# Altium PCB PCB1.PcbDoc (part 1 of 4)
Units mm, origin at the board's own origin, x right, y up, seen from the top; angles counter-clockwise.
Board outline 120 x 70 mm, 6 copper layers (SIG TOP, GND1, PWR, SIG, GND2, SIG BOT), stack 1.538 mm thick; 355 components, 304 nets, 1156 pads, 166 vias.
Unrouted connection lines stored in the file: 534.
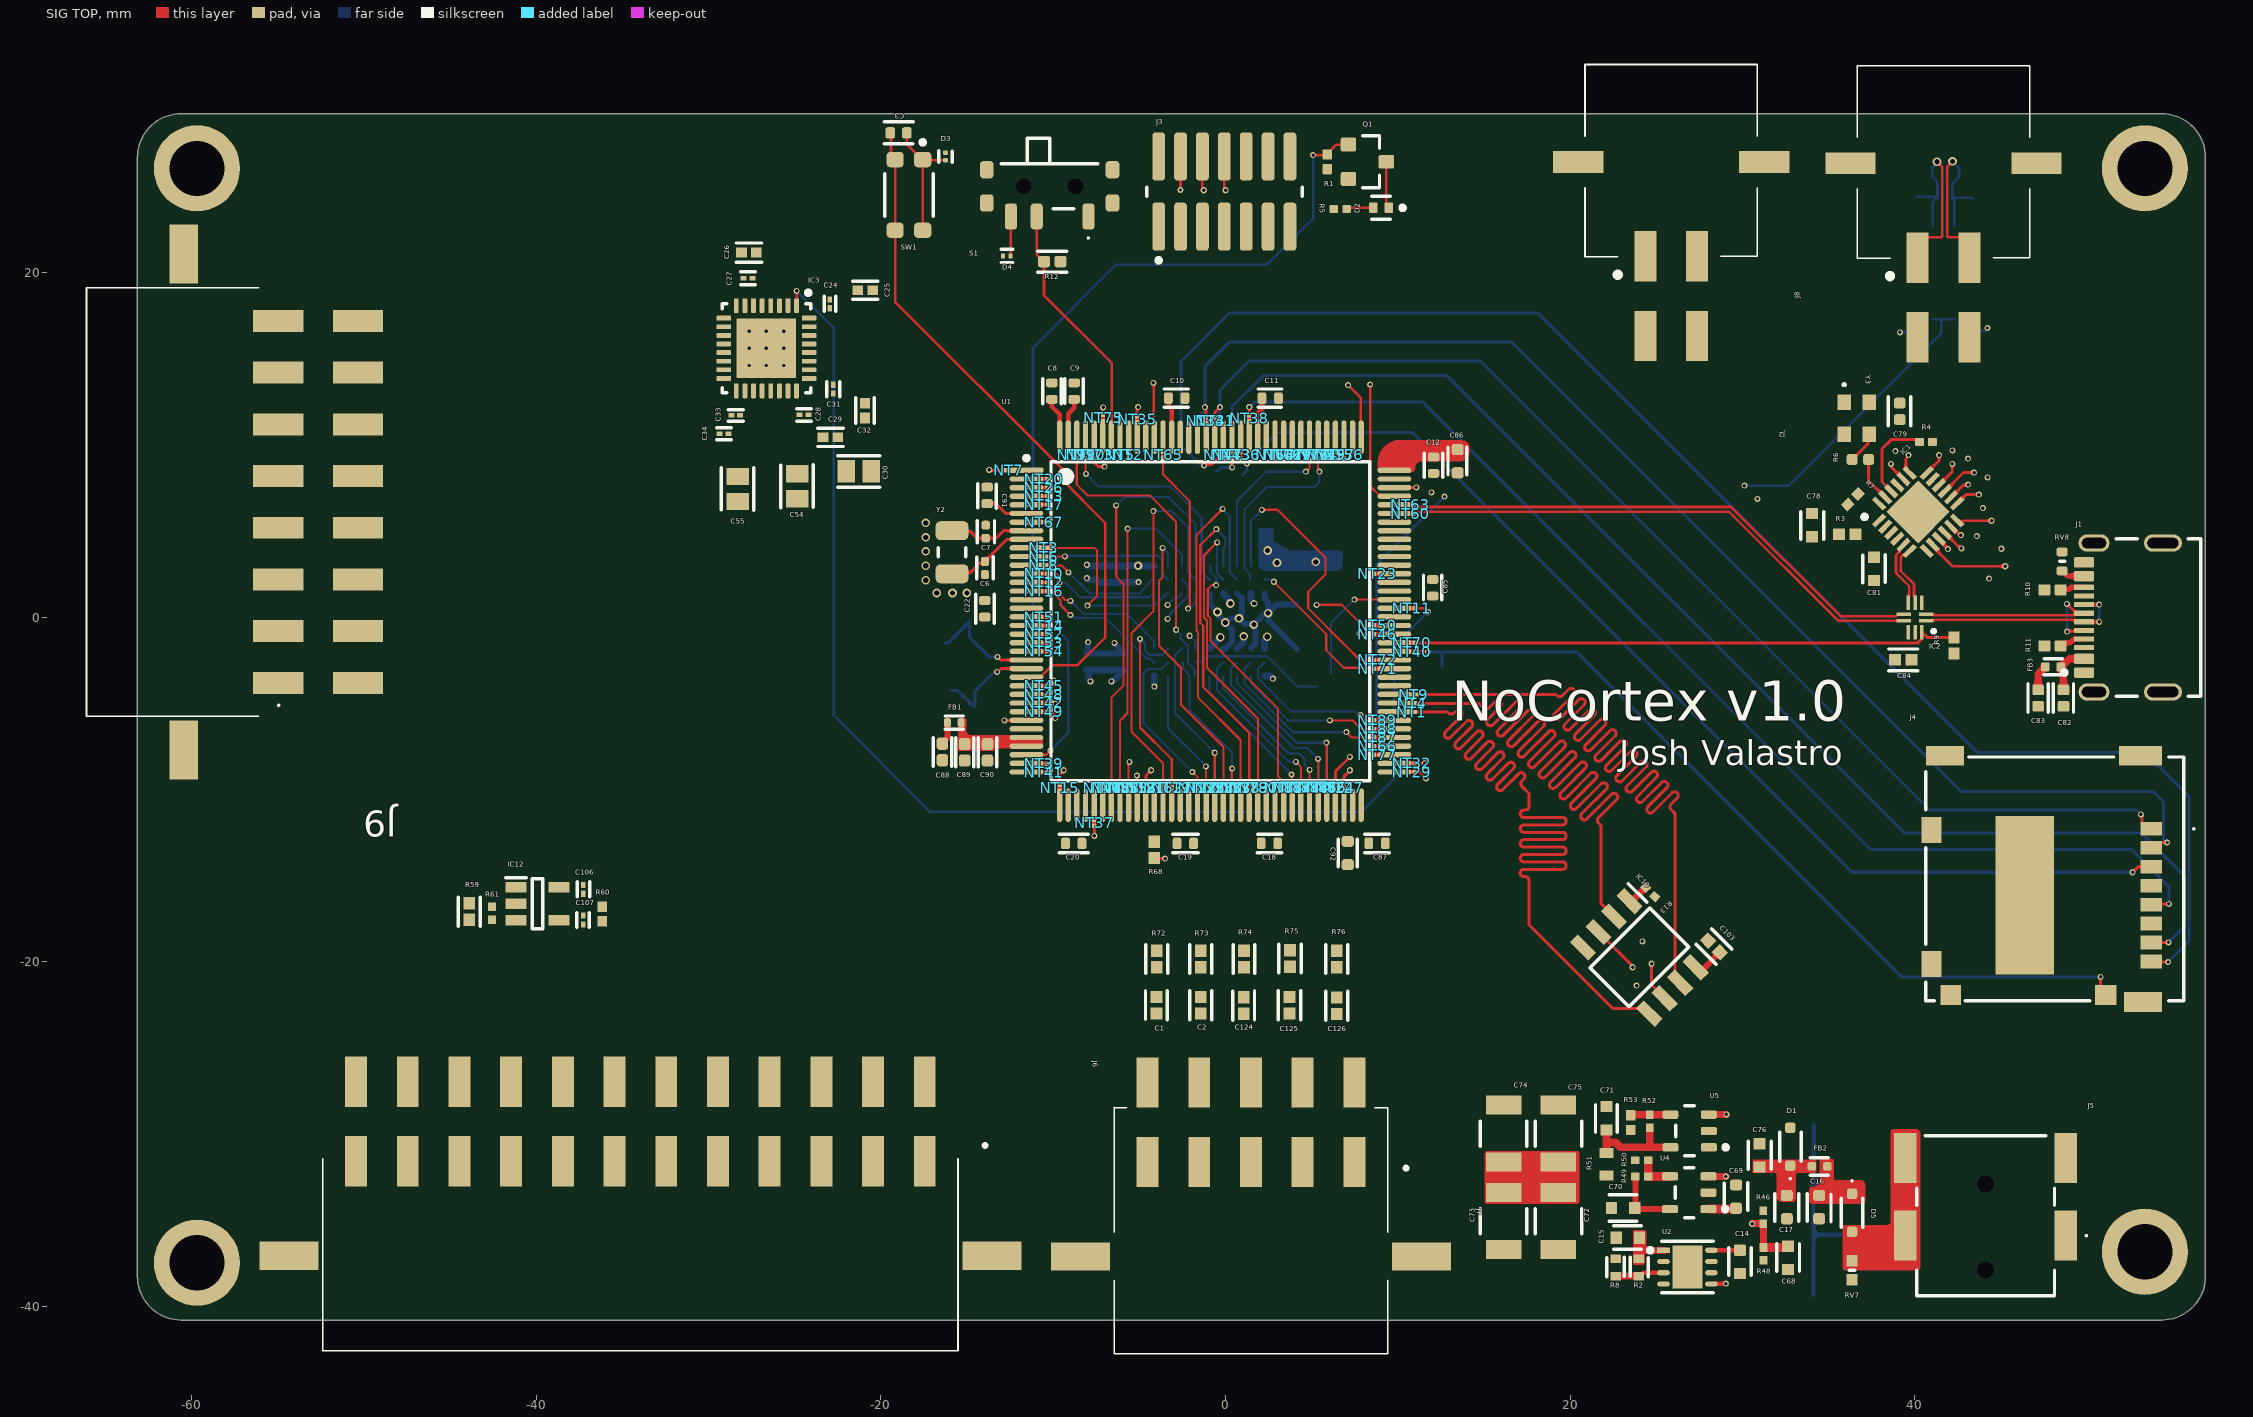
[diagram p0: SIG TOP view]
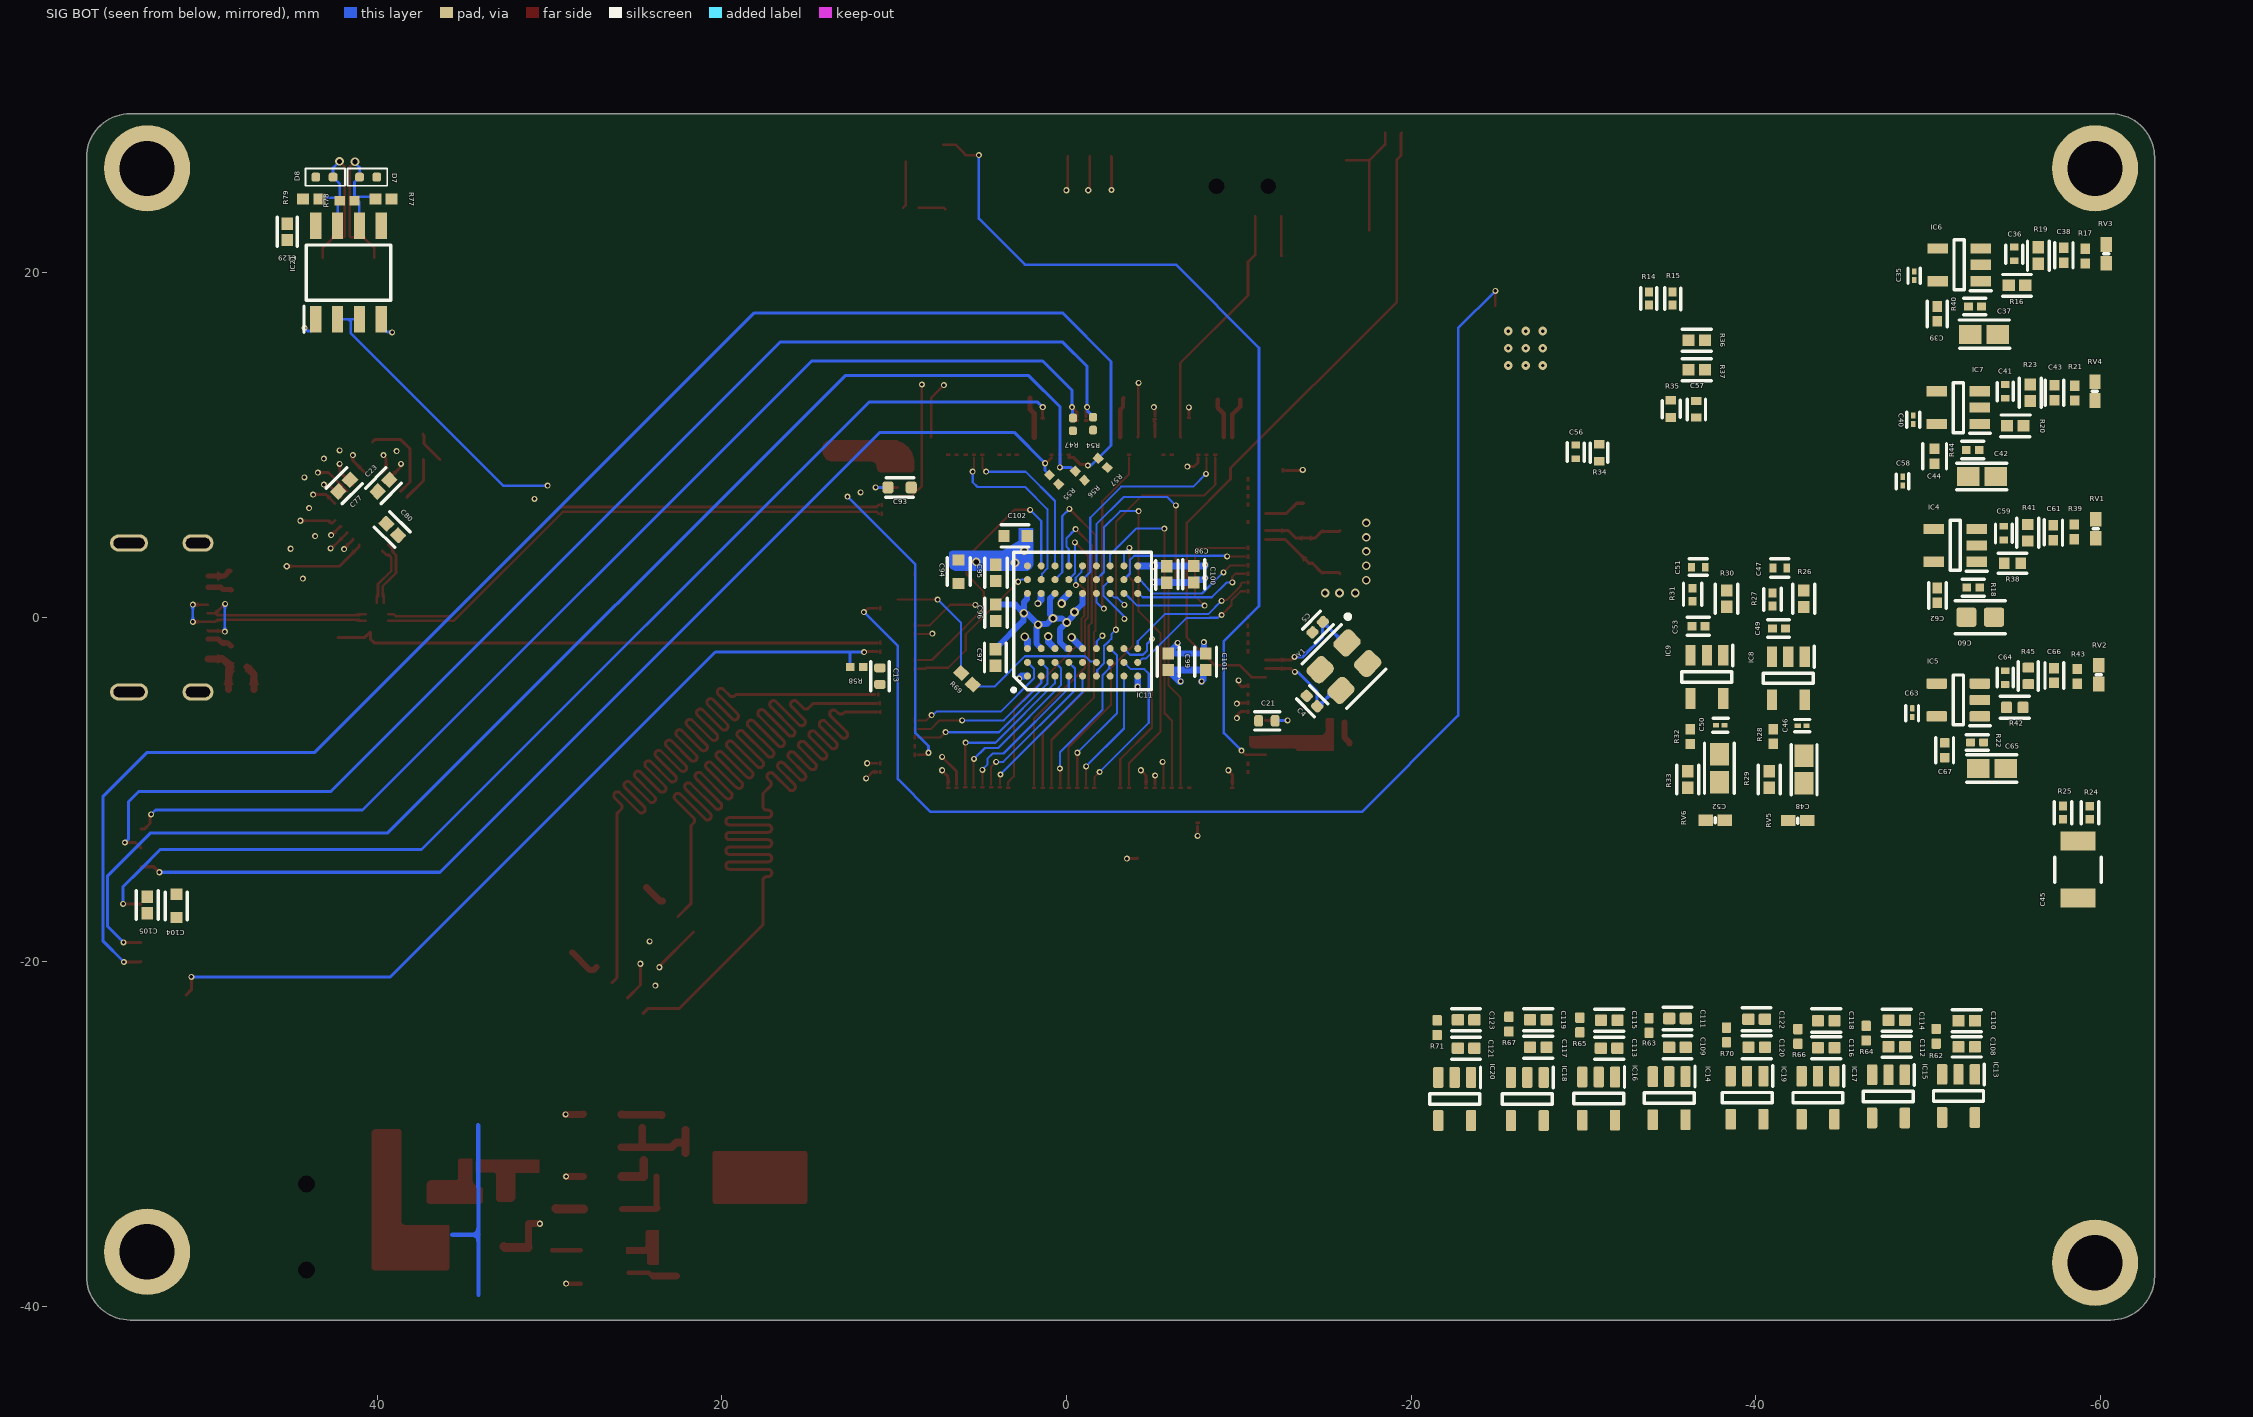
[diagram p1: SIG BOT view, seen from below]
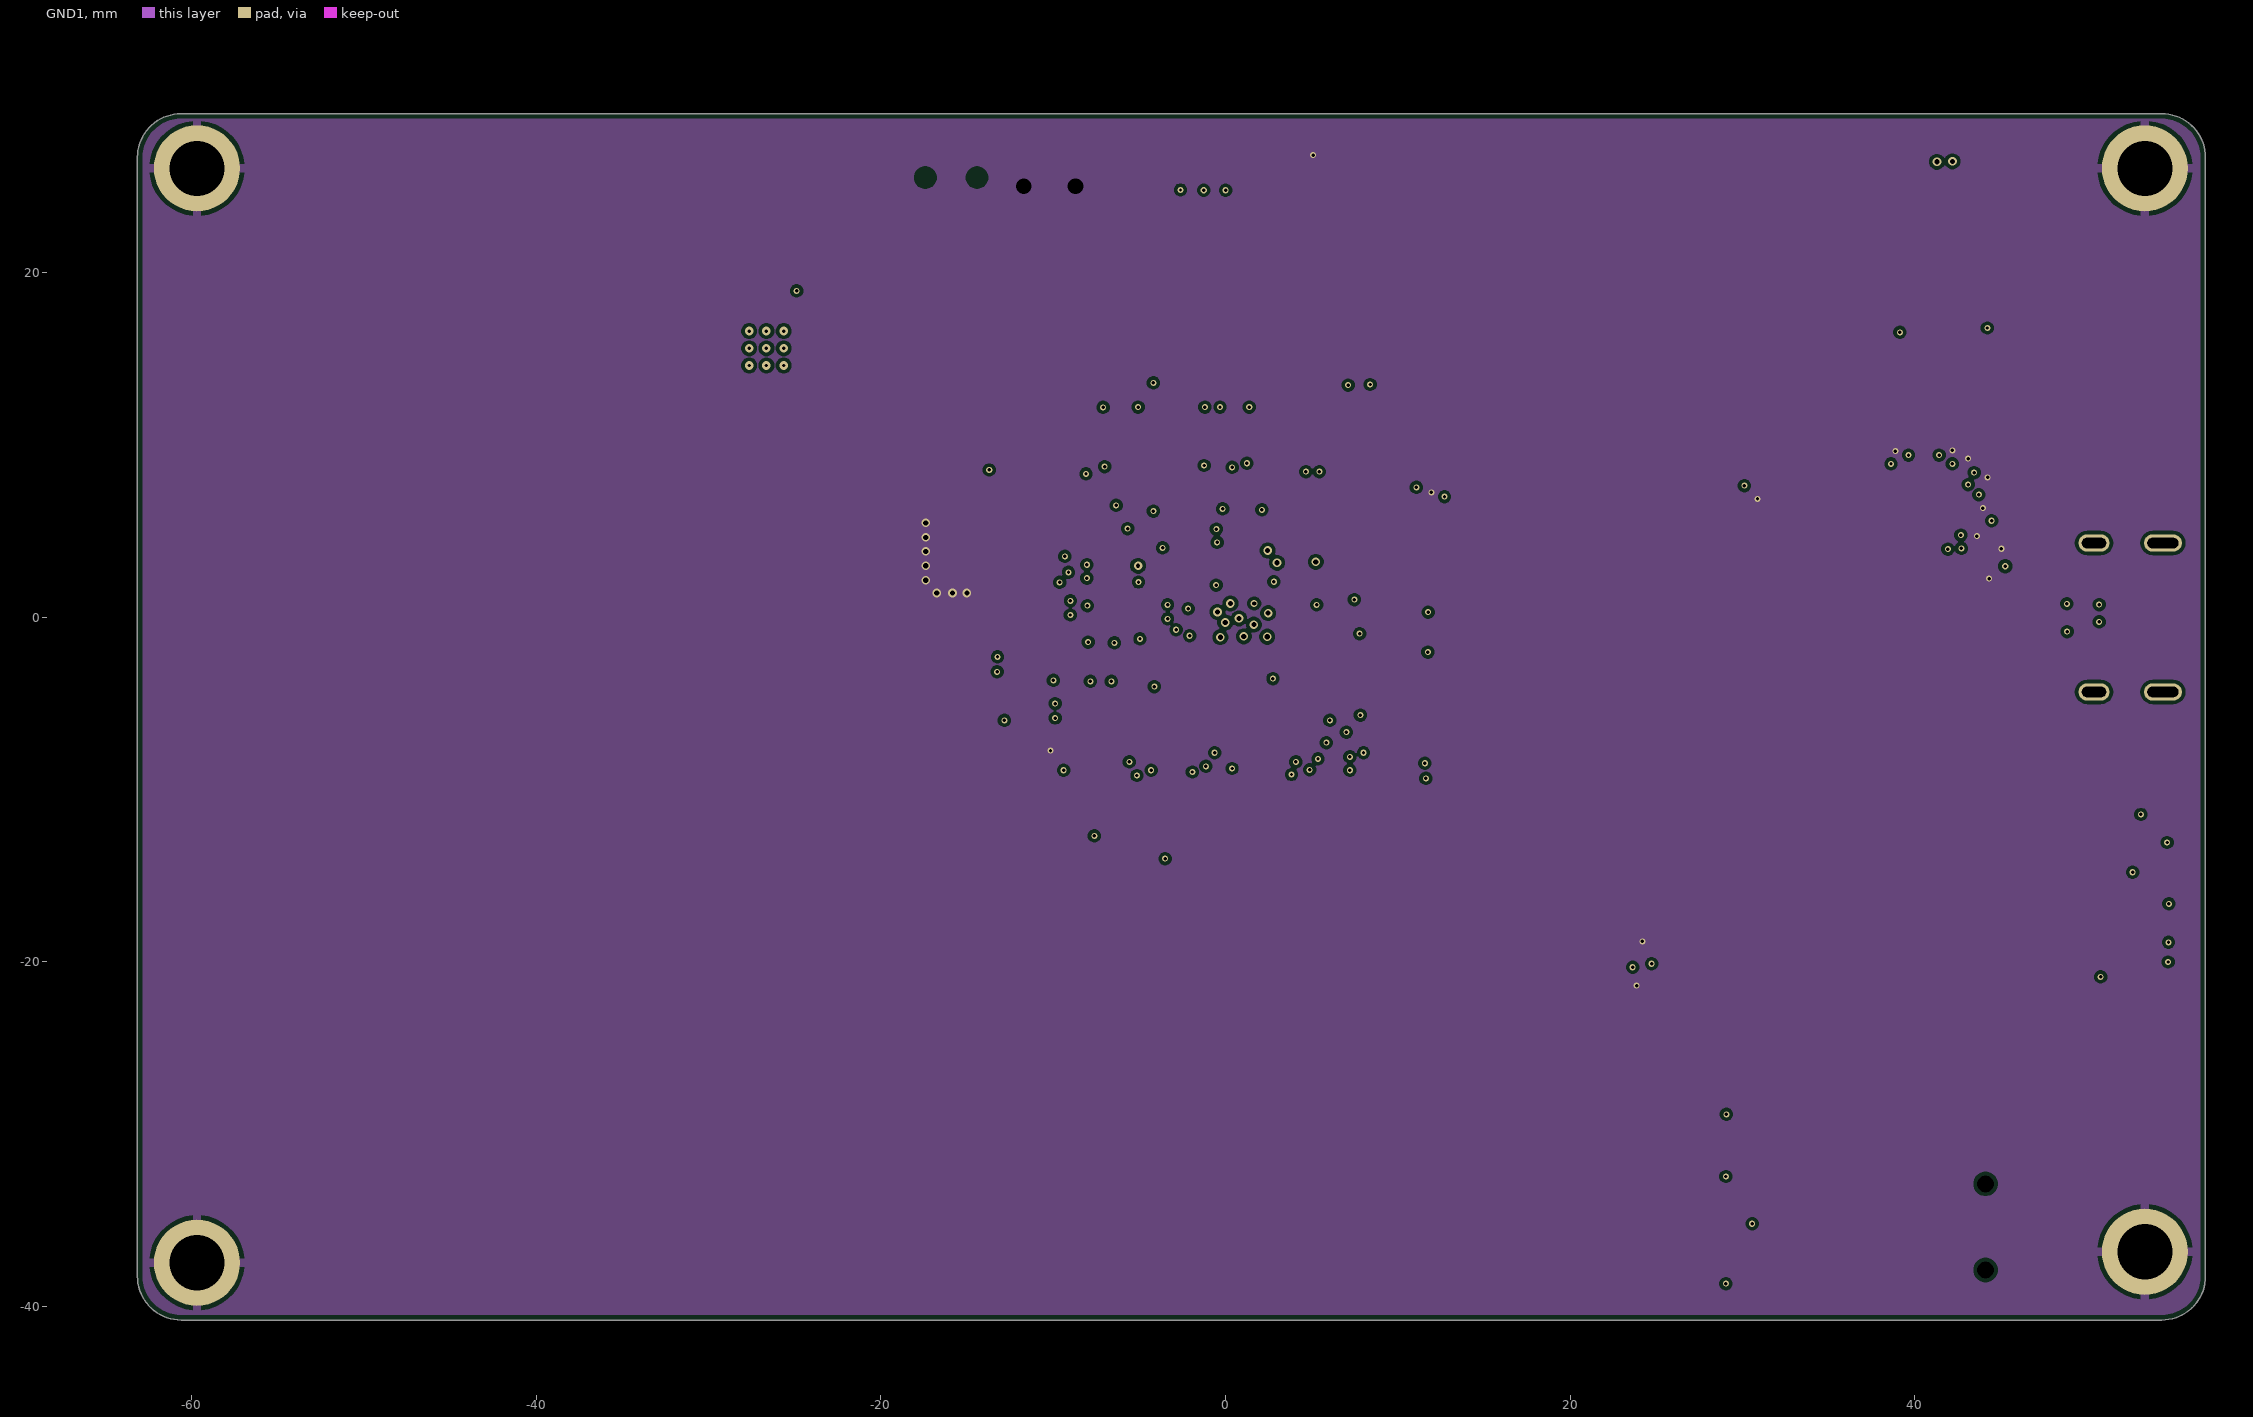
[diagram p2: GND1]
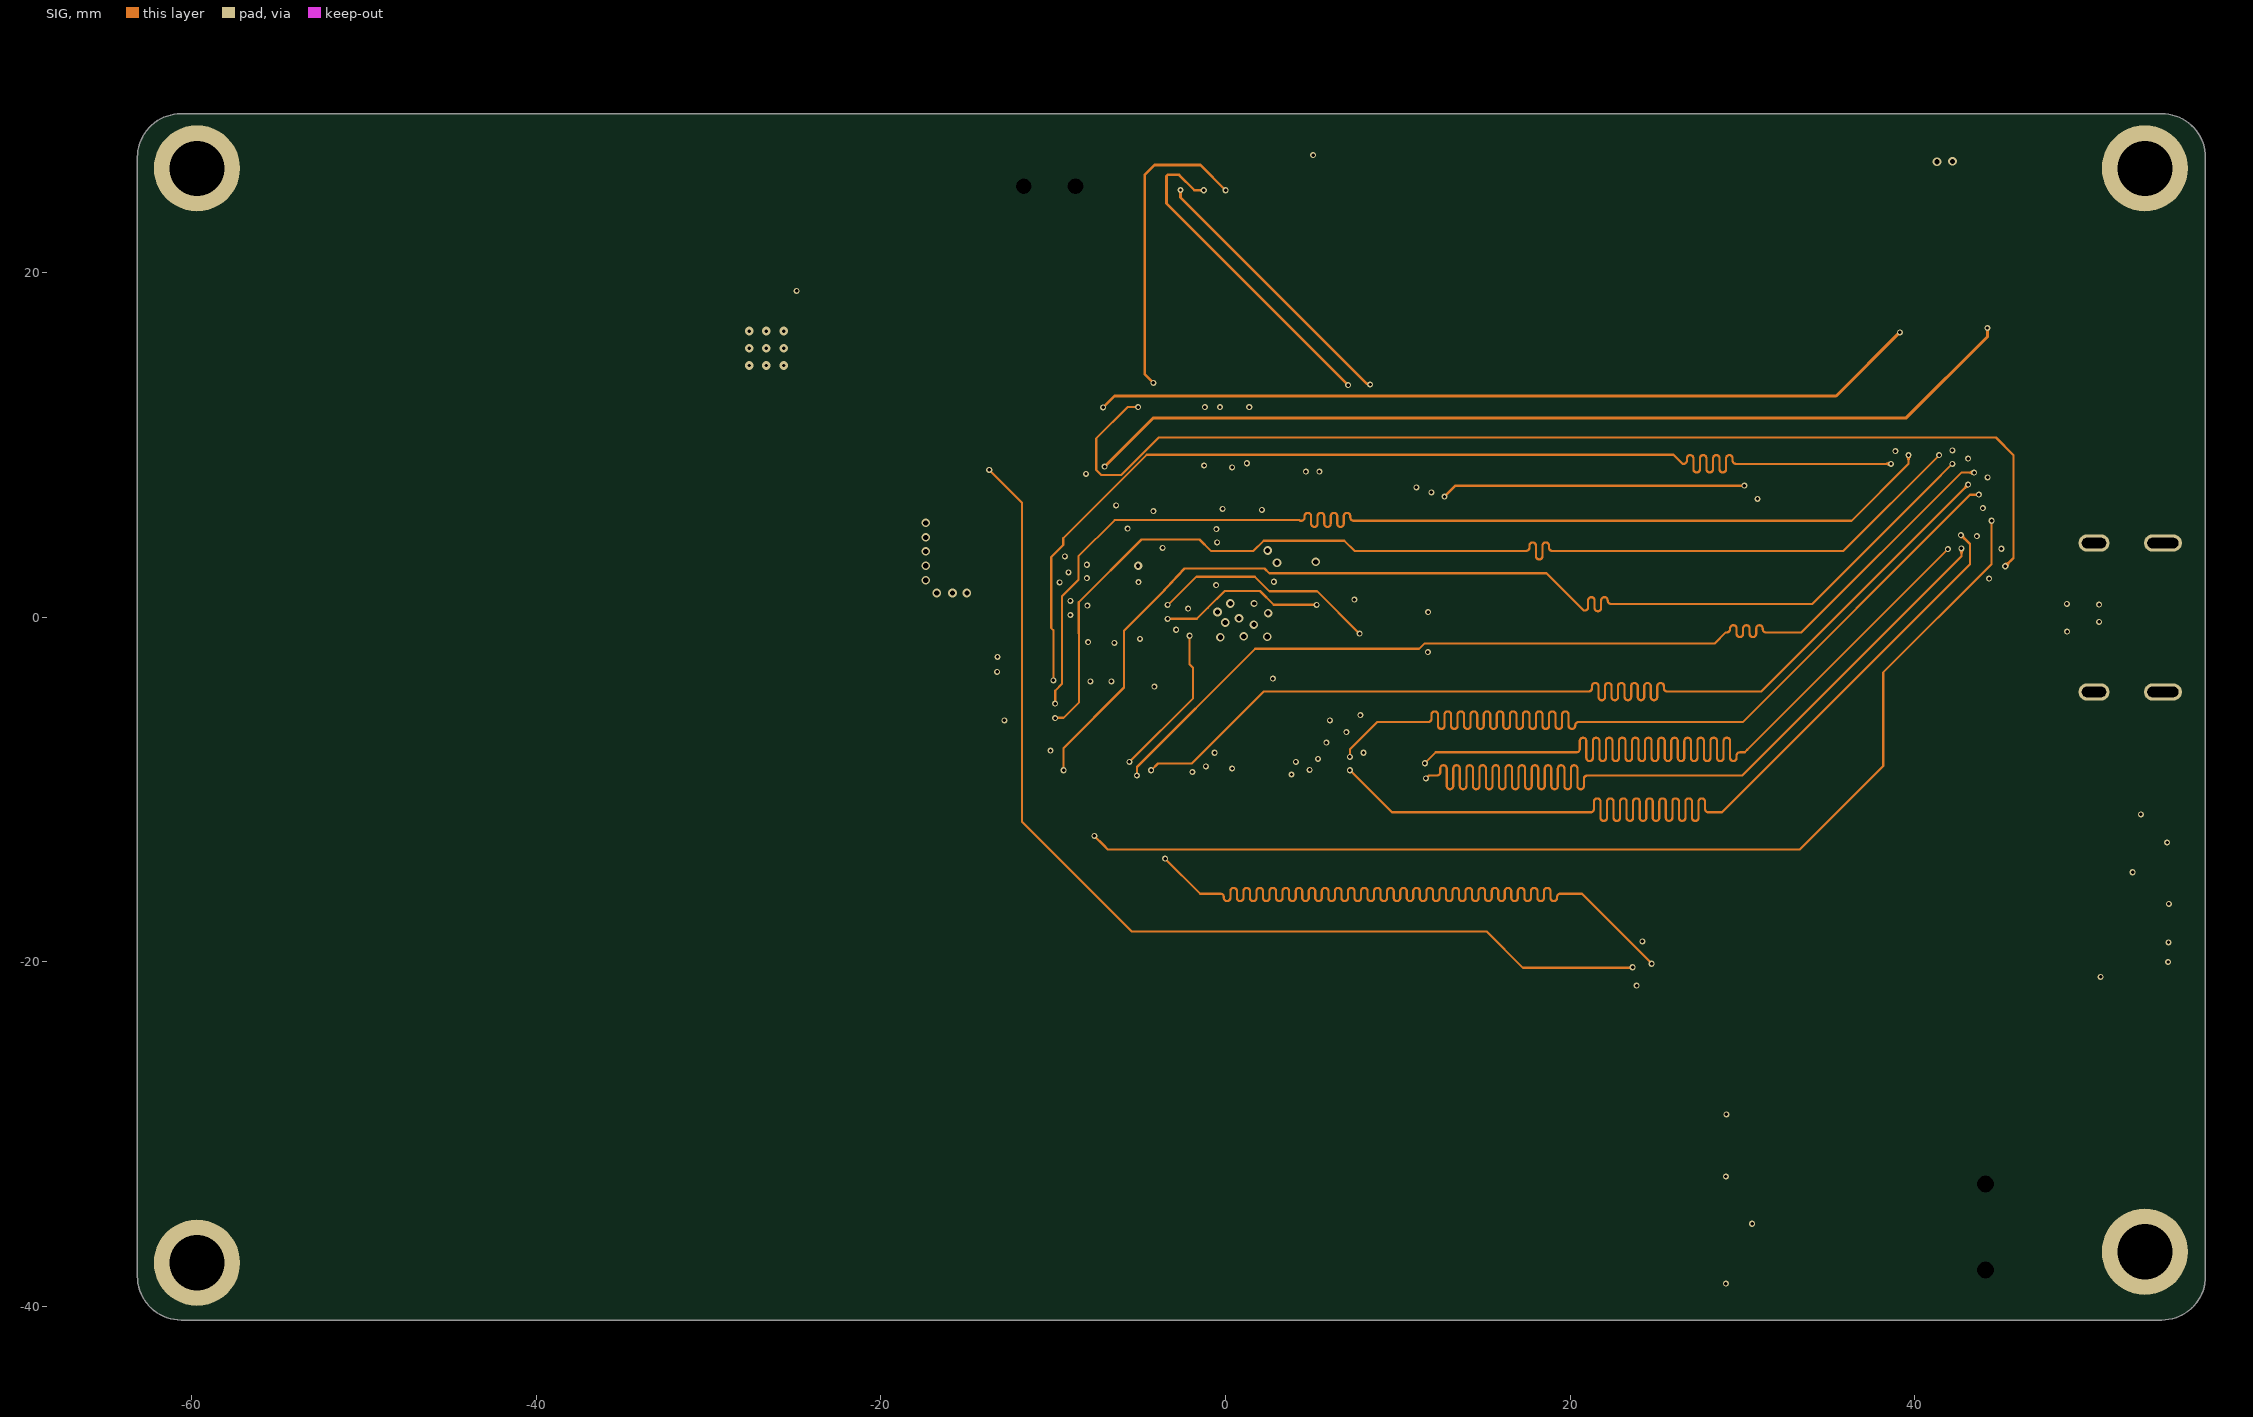
[diagram p3: SIG]
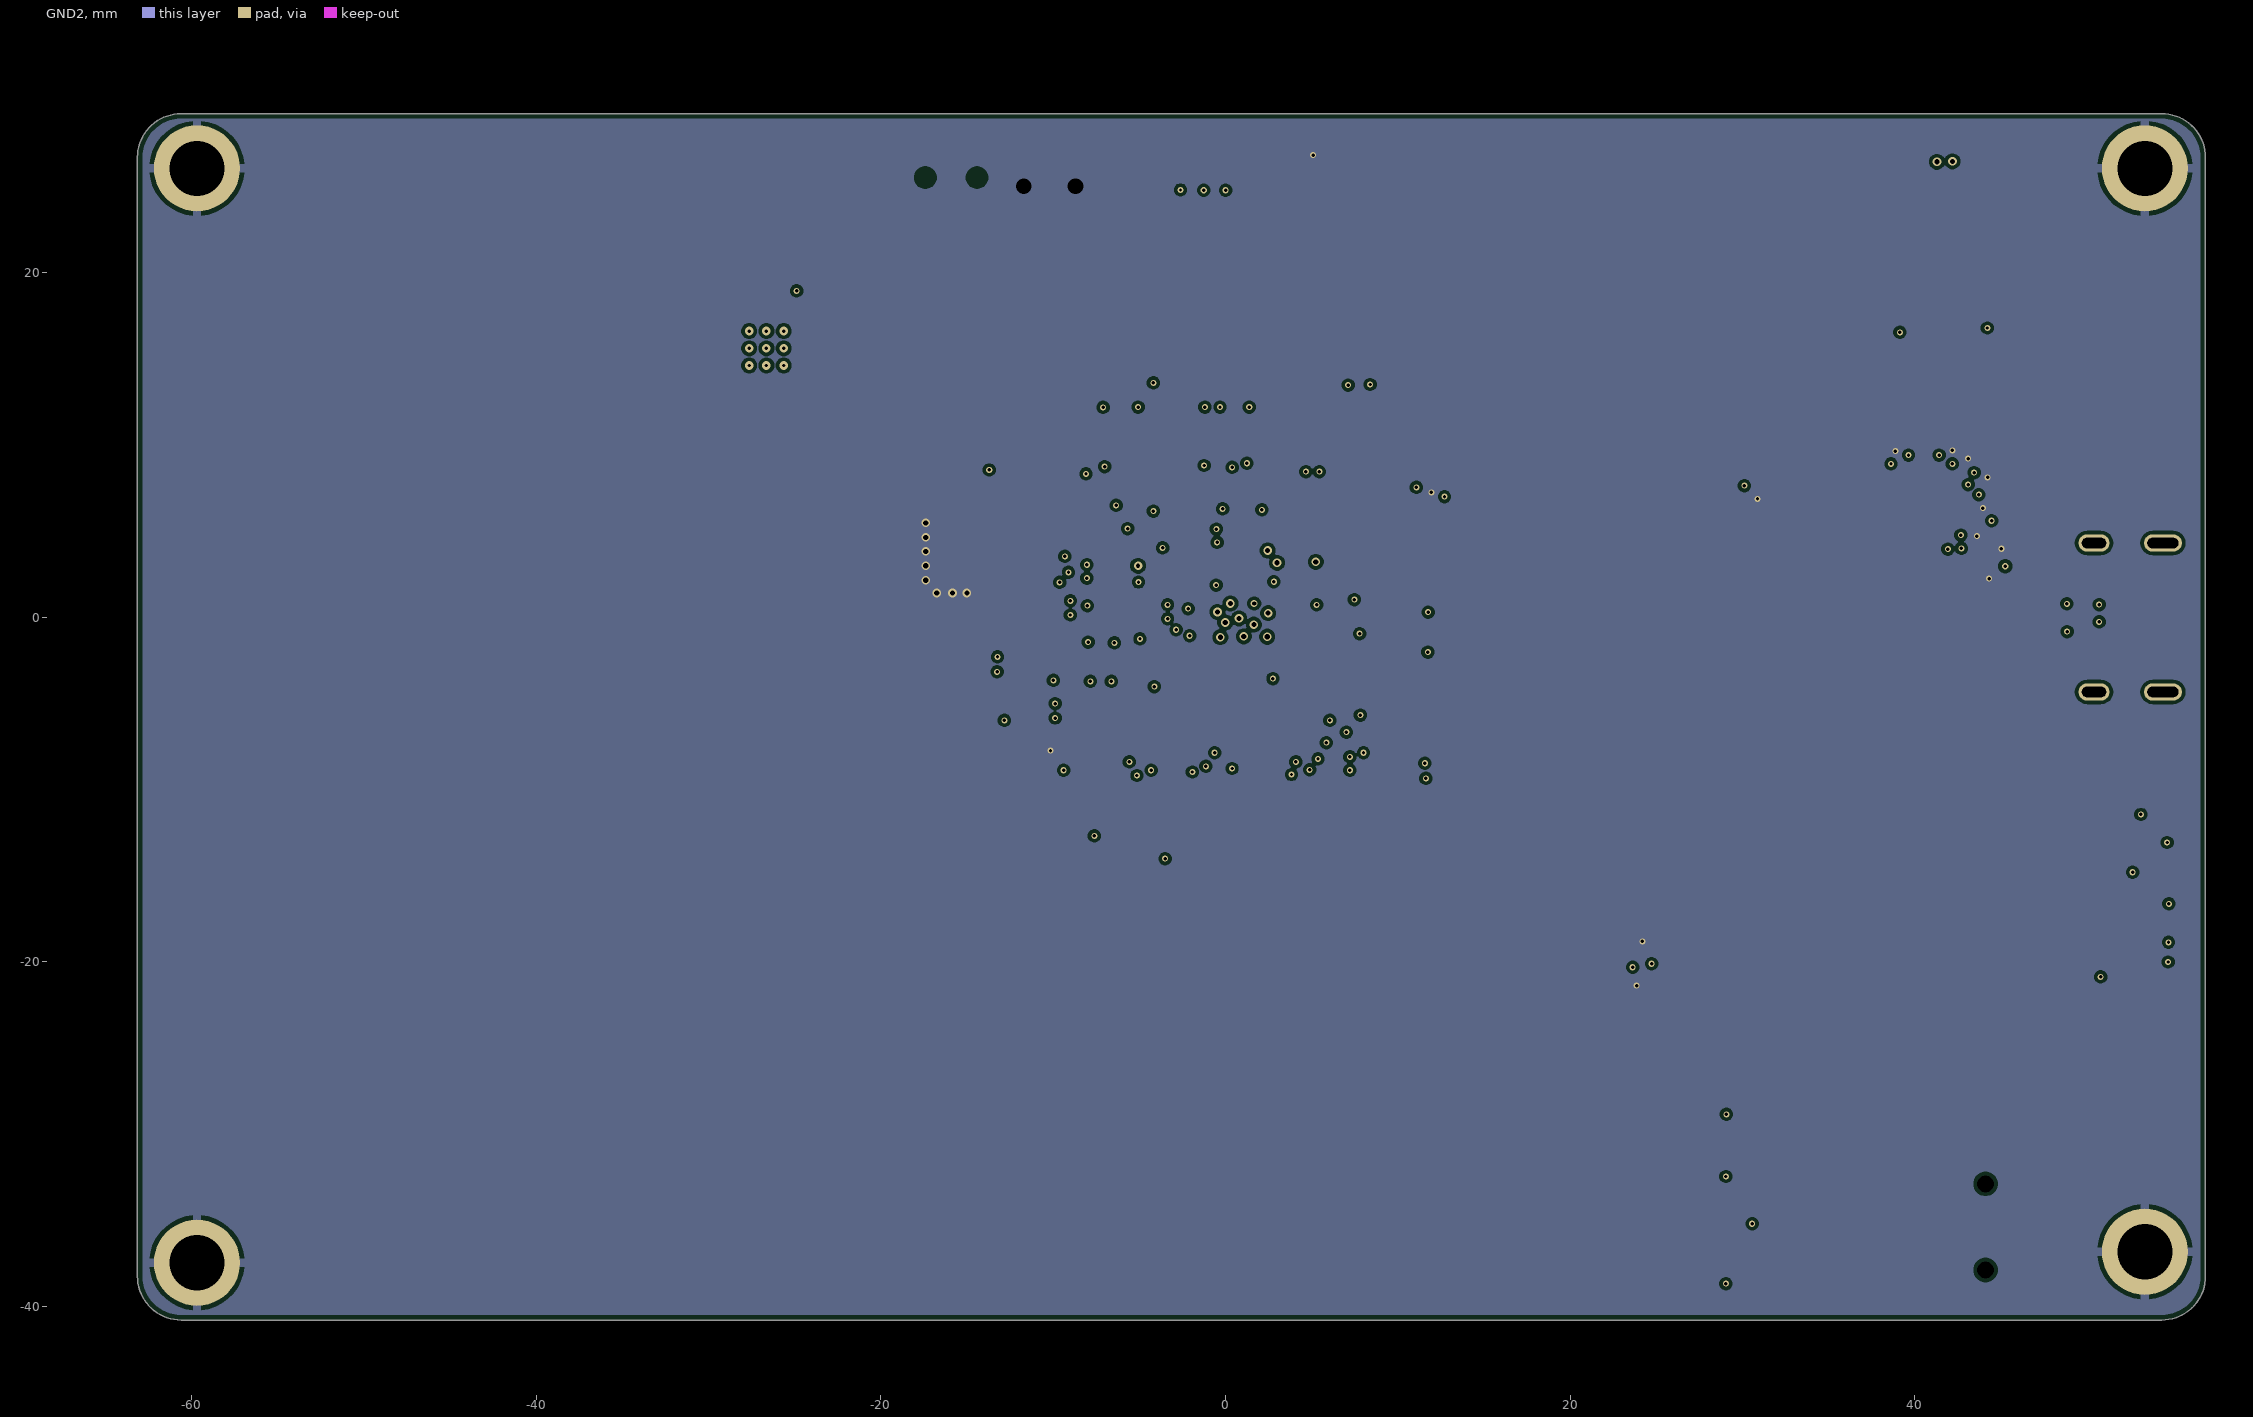
[diagram p4: GND2]

## Layer stack, top to bottom
Top Solder: solder mask 0.0102, Solder Resist, Dk 3.5
SIG TOP: signal copper 0.035
Prepreg 1: prepreg 0.0994, PP-006, Dk 4.1
GND1: signal copper 0.0152
Dielectric 4: core 0.55, Core-009, Dk 4.5
PWR: signal copper 0.0152
Prepreg 2: prepreg 0.1088, FR-4, Dk 4.8
SIG: signal copper 0.0152
Dielectric 5: core 0.55, Core-009, Dk 4.5
GND2: signal copper 0.0152
Dielectric 3: prepreg 0.0994, PP-006, Dk 4.1
SIG BOT: signal copper 0.035
Bottom Solder: solder mask 0.0102, Solder Resist, Dk 3.5

## Board outline
-63.145,-38.252 -63.145,26.668 cw(c-60.605,26.668) -60.605,29.208 54.315,29.208 cw(c54.315,26.668) 56.855,26.668 56.855,-38.252 cw(c54.315,-38.252) 54.315,-40.792 -60.605,-40.792 cw(c-60.605,-38.252)

## Design rules (kind name [scope] priority, off if disabled: settings)
BoardOutlineClearance [All] p1: gap=0.3 ignorepadtopadclearanceinfootprint=FALSE except(0.4: Arc-SplitBarrior Arc-SplitContinuation Track-SplitBarrior Track-SplitContinuation SMDPad-SplitBarrior SMDPad-SplitContinuation THPad-SplitBarrior THPad-SplitContinuation Via-SplitBarrior Via-SplitContinuation Fill-SplitBarrior Fill-SplitContinuation Poly-SplitBarrior Poly-SplitContinuation Region-SplitBarrior Region-SplitContinuation Text-SplitBarrior Text-SplitContinuation)
Clearance "Clearance Different Nets" [All] p1: gap=0.2 ignorepadtopadclearanceinfootprint=FALSE except(0.089: Arc-Arc Arc-Track Arc-SMDPad Track-Track Track-SMDPad; 0.127: SMDPad-SMDPad SMDPad-Via THPad-Via Via-Via; 0.254: Arc-Via Arc-Text Track-Via Track-Text SMDPad-Text THPad-Text Via-Text Fill-Text Poly-Text Region-Text Text-Text; 0.5: THPad-THPad Via-Hole)
Clearance "Clearance Same Nets" [All] p2: gap=0.2 ignorepadtopadclearanceinfootprint=FALSE except(0.089: Arc-Arc Arc-Track Arc-SMDPad Track-Track Track-SMDPad SMDPad-SMDPad; 0.127: SMDPad-Via THPad-Via; 0.254: Arc-Via Arc-Text Track-Via Track-Text SMDPad-Text THPad-Text Via-Via Via-Text Fill-Text Poly-Text Region-Text Text-Text)
Clearance "Clearance Bottom Layer" [OnLayer('Bottom Layer')] p3: gap=0.203 ignorepadtopadclearanceinfootprint=TRUE except(0.254: Arc-Text Track-Text SMDPad-Text THPad-Text Via-Text Fill-Text Poly-Text Region-Text Text-Text)
Clearance "Clearance Top Layer" [OnLayer('Top Layer')] p4: gap=0.203 ignorepadtopadclearanceinfootprint=TRUE except(0.254: Arc-Text Track-Text SMDPad-Text THPad-Text Via-Text Fill-Text Poly-Text Region-Text Text-Text)
ComponentClearance NetTieClearance [InComponentClass('NetTies')] p2: gap=0 collisioncheckmode=3 verticalgap=0 showdistances=FALSE
ComponentClearance NetTies [All] p3: gap=0.254 collisioncheckmode=3 verticalgap=0.254 showdistances=FALSE
DiffPairsRouting [All] p1: maxlimit=0.127 minlimit=0.127 mostfreqgap=0.127 toplayer_minwidth=0.149 toplayer_maxwidth=0.149 toplayer_prefwidth=0.149 midlayer1_minwidth=0.109 midlayer1_maxwidth=0.109 midlayer1_prefwidth=0.109 midlayer2_minwidth=0.102 midlayer2_maxwidth=0.102 midlayer2_prefwidth=0.102 midlayer3_minwidth=0.102 midlayer3_maxwidth=0.102 midlayer3_prefwidth=0.102 midlayer4_minwidth=0.109 midlayer4_maxwidth=0.109 midlayer4_prefwidth=0.109 bottomlayer_minwidth=0.149 bottomlayer_maxwidth=0.149 bottomlayer_prefwidth=0.149 impedanceprofiledriven=TRUE impedanceprofileid={338CEFDF-92EC-4F22-A444-8B00021438B8} impedanceprofilevalue=90.000000 maxuncoupledlength=12.7
HoleSize [All] p1: absolutevalues=TRUE maxlimit=6.3 minlimit=0.2 maxpercent=80.000 minpercent=20.000
HoleToHoleClearance [All] p1: gap=0.154 allowstackedmicrovias=TRUE
MatchedLengths [InDifferentialPairClass('All Differential Pairs')] p1: tolerance=25.4 checknetsindiffpair=FALSE checkdiffpairvsdiffpair=TRUE checkxsignals=TRUE checkothers=TRUE usedelayunits=TRUE delaytolerance=100.000000
MinimumAnnularRing [All] p1: minimumring=0.13
MinimumSolderMaskSliver [All] p1: minsoldermaskwidth=0.1
PolygonConnect PolygonConnect_1 [All] p1: thpad.connectstyle=Relief thpad.reliefconductorwidth=0.508 thpad.reliefentries=4 thpad.polygonreliefangle="90 Angle" thpad.airgapwidth=0.254 smdpad.connectstyle=Relief smdpad.reliefconductorwidth=0.508 smdpad.reliefentries=4 smdpad.polygonreliefangle="90 Angle" smdpad.airgapwidth=0.254 via.connectstyle=Direct via.reliefconductorwidth=0.508 via.reliefentries=4 via.polygonreliefangle="90 Angle" via.airgapwidth=0.254
RoutingCorners [All] p1: cornerstyle=Round minsetback=2.54 maxsetback=2.54
RoutingVias [All] p1: holewidth=0.5 width=1 viastyle="Through Hole" minholewidth=0.2 minwidth=0.35 maxholewidth=1 maxwidth=2
SilkToSilkClearance [All] p1: silktosilkclearance=0.1
SilkToSolderMaskClearance [IsPad] p1: minsilkscreentomaskgap=0.1 clearancetoexposedcopper=TRUE
SolderMaskExpansion [All] p1: expansion=0.102 istentingtop=FALSE
SupplyNets "Schematic Supply Nets_15" [InNet('+5VA')] p1: voltage=0.000
SupplyNets "Schematic Supply Nets_14" [InNet('+5V')] p2: voltage=0.000
SupplyNets "Schematic Supply Nets_12" [InNet('+3V3')] p3: voltage=0.000
SupplyNets "Schematic Supply Nets_11" [InNet('GND')] p4: voltage=0.000
SupplyNets "Schematic Supply Nets_10" [InNet('3V3')] p5: voltage=0.000
SupplyNets "Schematic Supply Nets_9" [InNet('+VUSB_FILT')] p6: voltage=0.000
SupplyNets "Schematic Supply Nets_8" [InNet('+VCC_RP')] p7: voltage=0.000
SupplyNets "Schematic Supply Nets_5" [InNet('+VCC_FILT')] p8: voltage=0.000
SupplyNets "Schematic Supply Nets_4" [InNet('1V8')] p9: voltage=0.000
SupplyNets "Schematic Supply Nets_3" [InNet('+VCC')] p10: voltage=0.000
SupplyNets "Schematic Supply Nets_2" [InNet('+VREF')] p11: voltage=0.000
SupplyNets "Schematic Supply Nets_1" [InNet('+1V8')] p12: voltage=0.000
SupplyNets "Schematic Supply Nets" [InNet('+VUSB')] p13: voltage=0.000
Width "SWO widths" [InNet('DEBUG_JTCK_SWCLK') and InNet('DEBUG_JTDO_SWO') and InNet('DEBUG_JTMS_SWDIO')] p1: maxlimit=0.254 minlimit=0.254 preferedwidth=0.254
Width "CLK Signal Width" [InNet('CODEC_MCLK') and InNet('SAI1_SCK_A')] p2: maxlimit=0.171 minlimit=0.125 preferedwidth=0.129 toplayer_minwidth=0.171 toplayer_prefwidth=0.171 midlayer1_minwidth=0.129 midlayer1_maxwidth=0.129 midlayer2_maxwidth=0.125 midlayer2_prefwidth=0.125 midlayer3_maxwidth=0.125 midlayer3_prefwidth=0.125 midlayer4_minwidth=0.129 midlayer4_maxwidth=0.129 bottomlayer_minwidth=0.171 bottomlayer_prefwidth=0.171 impedanceprofiledriven=TRUE impedanceprofileid={D3C86B80-4249-4FE0-8FF2-653D211A7537} impedanceprofilevalue=50.000000 minimp=50.000000 maximp=50.000000 favimp=50.000000
Width Qspi_width [InNet('QSPI_IO1') or InNet('QSPI_IO2') or InNet('QSPI_IO3') or InNet('QSPI_IO4') or InNet('QSPI_CLK')] p3: maxlimit=0.171 minlimit=0.125 preferedwidth=0.129 toplayer_minwidth=0.171 toplayer_prefwidth=0.171 midlayer1_minwidth=0.129 midlayer1_maxwidth=0.129 midlayer2_maxwidth=0.125 midlayer2_prefwidth=0.125 midlayer3_maxwidth=0.125 midlayer3_prefwidth=0.125 midlayer4_minwidth=0.129 midlayer4_maxwidth=0.129 bottomlayer_minwidth=0.171 bottomlayer_prefwidth=0.171 impedanceprofiledriven=TRUE impedanceprofileid={D3C86B80-4249-4FE0-8FF2-653D211A7537} impedanceprofilevalue=50.000000 minimp=50.000000 maximp=50.000000 favimp=50.000000
Width ULPI_Width [InNetClass('ULPI')] p4: maxlimit=0.171 minlimit=0.125 preferedwidth=0.129 toplayer_minwidth=0.171 toplayer_prefwidth=0.171 midlayer1_minwidth=0.129 midlayer1_maxwidth=0.129 midlayer2_maxwidth=0.125 midlayer2_prefwidth=0.125 midlayer3_maxwidth=0.125 midlayer3_prefwidth=0.125 midlayer4_minwidth=0.129 midlayer4_maxwidth=0.129 bottomlayer_minwidth=0.171 bottomlayer_prefwidth=0.171 impedanceprofiledriven=TRUE impedanceprofileid={D3C86B80-4249-4FE0-8FF2-653D211A7537} impedanceprofilevalue=50.000000 minimp=50.000000 maximp=50.000000 favimp=50.000000
Width [All] p5: maxlimit=2.54 minlimit=0.089 preferedwidth=0.381
23 further rules are at their usual default settings.

## Classes and differential pairs
net class PG[0..15]: PG0 PG1 PG2 PG3 PG4 PG5 PG6 PG7 PG8 PG9 PG10 PG11 PG12 PG13 PG14 PG15
net class PF[0..15]: PF0 PF1 PF2 PF3 PF4 PF5 PF6 PF7 PF8 PF9 PF10 PF11 PF12 PF13 PF14 PF15
net class PE[0..15]: PE0 PE1 PE2 PE3 PE4 PE5 PE6 PE7 PE8 PE9 PE10 PE11 PE12 PE13 PE14 PE15
net class PD[0..15]: PD0 PD1 PD2 PD3 PD4 PD5 PD6 PD7 PD8 PD9 PD10 PD11 PD12 PD13 PD14 PD15
net class PC[0..13]: PC0 PC1 PC2 PC3 PC4 PC5 PC6 PC7 PC8 PC9 PC10 PC11 PC12 PC13
net class PB[0..15]: PB0 PB1 PB2 PB5 PB6 PB7 PB8 PB9 PB10 PB11 PB12 PB13 PB14 PB15
net class PA[1..12]: PA1 PA2 PA3 PA4 PA5 PA6 PA7 PA8 PA11 PA12
component class U_USB_HS: 23 C23 C77 C78 C79 C80 C81 IC1 R3 R4 R6 R7 X1 Y3
component class U_Power: C14 C15 C16 C17 C68 C69 C70 C71 C72 C73 C74 C75 C76 D1 D5 FB2 J5 R2 R8 R46 R48 R49 R50 R51 R52 R53 RV7 U2 U4 U5
component class U_Potentiometers: C108 C109 C110 C111 C112 C113 C114 C115 C116 C117 C118 C119 C120 C121 C122 C123 IC13 IC14 IC15 IC16 IC17 IC18 IC19 IC20 R62 R63 R64 R65 R66 R67 R70 R71
component class U_Peripherals: C82 C83 C84 C129 D7 D8 FB3 IC2 IC21 J1 J2 J6 J8 R9 R10 R11 R77 R78 R79 RV8
component class U_Memory: C94 C95 C96 C97 C98 C99 C100 C101 C102 C103 C104 C105 IC10 IC11 J4 R13 R47 R54 R55 R56 R57 R58
component class U_MCU: C3 C4 C5 C6 C7 C8 C9 C10 C11 C12 C13 C18 C19 C20 C21 C22 C85 C86 C87 C88 C89 C90 C91 C92 C93 D2 D3 D4 FB1 J3 Q1 R1 R5 R12 S1 SW1 U1 Y1 Y2
component class U_MCU_Connections: NT1 NT2 NT3 NT4 NT5 NT6 NT7 NT8 NT9 NT10 NT11 NT12 NT13 NT14 NT15 NT16 NT17 NT18 NT19 NT20 NT21 NT22 NT23 NT24 NT25 NT26 NT27 NT28 NT29 NT30 NT31 NT32 NT33 NT34 NT35 NT36 NT37 NT38 NT39 NT40 NT41 NT42 NT43 NT44 NT45 NT46 NT47 NT48 NT49 NT50 NT51 NT52 NT53 NT54 NT55 NT56 NT57 NT58 NT59 NT60 NT61 NT62 NT63 NT64 NT65 NT66 NT67 NT68 NT69 NT70 NT71 NT72 NT73 NT74 NT75 NT76 NT77 NT78 NT79 NT80 NT81 NT82 NT83 NT84 NT85 NT86 NT87 NT88 NT89 NT90 NT91 R68 R69
component class U_Input_Output_Filtering: C35 C36 C37 C38 C39 C40 C41 C42 C43 C44 C45 C46 C47 C48 C49 C50 C51 C52 C53 C58 C59 C60 C61 C62 C63 C64 C65 C66 C67 IC4 IC5 IC6 IC7 IC8 IC9 R16 R17 R18 R19 R20 R21 R22 R23 R24 R25 R26 R27 R28 R29 R30 R31 R32 R33 R38 R39 R40 R41 R42 R43 R44 R45 RV1 RV2 RV3 RV4 RV5 RV6
component class U_Footswitches: C1 C2 C124 C125 C126 J7 R72 R73 R74 R75 R76
component class U_Expression_Pedal: C106 C107 IC12 R59 R60 R61
component class U_Codec: C24 C25 C26 C27 C28 C29 C30 C31 C32 C33 C34 C54 C55 C56 C57 IC3 R14 R15 R34 R35 R36 R37
component class U_audio_io: J9
differential pair USB_FS_D: +USB_FS_D_P -USB_FS_D_N
differential pair USB_HS_D: +USB_HS_D_P -USB_HS_D_N
differential pair USB_D: +USB_D_P -USB_D_N
differential pair RS485_D: +RS485_D_P -RS485_D_N

## Components (designator, comment, footprint, x,y, rotation, side; value= is the part's Value field where it differs from the comment)
C1 "GCM155R71H104ME02J" FP-GCM155-0_05-IPC_A#1 -4.013,-22.53 r270 top
C2 "GCM155R71H104ME02J" FP-GCM155-0_05-IPC_A#1 -1.448,-22.53 r270 top
C3 "GCM155R71H104ME02J" FP-GCM155-0_05-IPC_A#2 -18.974,28.092 r0 top
C4 "GCM1555G1H100GA16D" FP-GCM155-0_05-IPC_B#1 -14.249,-4.877 r45 bottom
C5 "GCM1555G1H100GA16D" FP-GCM155-0_05-IPC_B#1 -14.58,-0.584 r315 bottom
C6 "GCM1555C1H3R3CA16J" FP-GCM155-0_05-IPC_C#1 -13.97,2.845 r270 top
C7 "GCM1555C1H3R3CA16J" FP-GCM155-0_05-IPC_C#1 -13.919,4.953 r90 top
C8 "GCM155R71H104ME02J" FP-GCM155-0_05-IPC_A#3 -10.084,13.106 r90 top
C9 "GCM155R71H104ME02J" FP-GCM155-0_05-IPC_A#3 -8.788,13.106 r90 top
C10 "GCM155R71H104ME02J" FP-GCM155-0_05-IPC_A#3 -2.841,12.7 r0 top
C11 "GCM155R71H104ME02J" FP-GCM155-0_05-IPC_A#3 2.591,12.7 r0 top
C12 "GCM155R71H104ME02J" FP-GCM155-0_05-IPC_A#3 12.065,8.814 r270 top
C13 "GCM155R71H104ME02J" FP-GCM155-0_05-IPC_A#3 10.82,-3.429 r270 bottom
C14 "GCM188C71A225KE02D" FP-GCH188-0_1-e0_2_0_5-MFG#1 29.845,-37.414 r90 top
C15 "GCM188C71A225KE02D" FP-GCH188-0_1-e0_2_0_5-MFG#2 23.343,-36.017 r0 top
C16 "GCM188C71A225KE02D" FP-GCH188-0_1-e0_2_0_5-MFG#3 34.442,-34.239 r90 top
C17 "GCM188C71A225KE02D" FP-GCH188-0_1-e0_2_0_5-MFG#3 32.563,-34.239 r90 top
C18 "GCM155R71H104ME02J" FP-GCM155-0_05-IPC_A#3 2.54,-13.132 r180 top
C19 "GCM155R71H104ME02J" FP-GCM155-0_05-IPC_A#3 -2.337,-13.132 r180 top
C20 "GCM155R71H104ME02J" FP-GCM155-0_05-IPC_A#3 -8.814,-13.132 r180 top
C21 "GCM155R71H104ME02J" FP-GCM155-0_05-IPC_A#3 -11.633,-6.02 r0 bottom
C22 "GCM155R71H104ME02J" FP-GCM155-0_05-IPC_A#3 -13.97,0.483 r90 top
C23 "GCM155R71H104ME02J" FP-GCM155-0_05-IPC_A#1 39.624,7.62 r135 bottom
C24 "GRM033C71C104ME14J" FP-GRM033-0_03-IPC_C#1 -22.964,18.175 r90 top
C25 "GRM155C70J105ME11J" FP-GRM155-0_1-IPC_B -20.91,18.963 r0 top
C26 "GRM155C70J105ME11J" FP-GRM155-0_1-IPC_B -27.663,21.147 r0 top
C27 "GRM033C71C104ME14J" FP-GRM033-0_03-IPC_C#1 -27.714,19.648 r0 top
C28 "GRM033C71C104ME14J" FP-GRM033-0_03-IPC_C#1 -24.46,11.725 r0 top
C29 "GRM155C70J105ME11J" FP-GRM155-0_1-IPC_B -22.936,10.43 r0 top
C30 "GRM21BC81E106KE51K" FP-GRM21B-0_15-IPC_C -21.285,8.449 r0 top
C31 "GRM033C71C104ME14J" FP-GRM033-0_03-IPC_C#1 -22.758,13.224 r270 top
C32 "GRM155C70J105ME11J" FP-GRM155-0_1-IPC_B -20.93,11.979 r270 top
C33 "GRM033C71C104ME14J" FP-GRM033-0_03-IPC_C#1 -28.425,11.698 r180 top
C34 "GRM033C71C104ME14J" FP-GRM033-0_03-IPC_C#1 -29.111,10.631 r180 top
C35 "GRM033C71C104ME14J" FP-GRM033-0_03-IPC_C#1 -49.189,19.802 r90 bottom
C36 "GCM155R71H103KA55W" FP-GCM155-0_05-MFG#1 -55.006,21.071 r270 bottom
C37 "GCM188D70G106ME36J" FP-GCM188-0_2-IPC_A#1 -53.253,16.398 r180 bottom
C38 "GCM155R71H221KA37J" FP-GCM155-0_05-IPC_B#2 -57.876,20.995 r270 bottom
C39 "GCM155R71H221KA37J" FP-GCM155-0_05-IPC_B#2 -50.536,17.592 r270 bottom
C40 "GRM033C71C104ME14J" FP-GRM033-0_03-IPC_C#1 -49.139,11.445 r90 bottom
C41 "GCM155R71H103KA55W" FP-GCM155-0_05-MFG#1 -54.473,13.096 r270 bottom
C42 "GCM188D70G106ME36J" FP-GCM188-0_2-IPC_A#1 -53.126,8.143 r180 bottom
C43 "GCM155R71H221KA37J" FP-GCM155-0_05-IPC_B#2 -57.343,13.02 r270 bottom
C44 "GCM155R71H221KA37J" FP-GCM155-0_05-IPC_B#2 -50.383,9.333 r270 bottom
C45 "GCM32EC71A476KE02K" FP-GCM32E-0_3-MFG -58.699,-14.656 r90 bottom
C46 "GRM033C71C104ME14J" FP-GRM033-0_03-IPC_C#1 -42.691,-6.299 r0 bottom
C47 "GCM155R71H103KA55W" FP-GCM155-0_05-MFG#1 -41.402,2.845 r0 bottom
C48 "GCM188D70G106ME36J" FP-GCM188-0_2-IPC_A#1 -42.793,-8.851 r270 bottom
C49 "GCM155R71H102KA37W" FP-GCM155-0_05-IPC_C#2 -41.347,-0.66 r180 bottom
C50 "GRM033C71C104ME14J" FP-GRM033-0_03-IPC_C#1 -37.941,-6.274 r0 bottom
C51 "GCM155R71H103KA55W" FP-GCM155-0_05-MFG#1 -36.671,2.896 r0 bottom
C52 "GCM188D70G106ME36J" FP-GCM188-0_2-IPC_A#1 -37.89,-8.775 r270 bottom
C53 "GCM155R71H102KA37W" FP-GCM155-0_05-IPC_C#2 -36.674,-0.533 r180 bottom
C54 "GRM21BC81E106KE51K" FP-GRM21B-0_15-IPC_C -24.867,7.585 r90 top
C55 "GRM21BC81E106KE51K" FP-GRM21B-0_15-IPC_C -28.321,7.433 r90 top
C56 "GCM155R71H103KA55W" FP-GCM155-0_05-MFG#1 -29.566,9.585 r90 bottom
C57 "GCM155D70G475ME36D" FP-GCM155-0_2-MFG -36.551,12.056 r90 bottom
C58 "GRM033C71C104ME14J" FP-GRM033-0_03-IPC_C#1 -48.529,7.888 r90 bottom
C59 "GCM155R71H103KA55W" FP-GCM155-0_05-MFG#1 -54.396,4.866 r270 bottom
C60 "GCM188D70G106ME36J" FP-GCM188-0_2-IPC_A#2 -53.025,-0.011 r180 bottom
C61 "GCM155R71H221KA37J" FP-GCM155-0_05-IPC_B#2 -57.267,4.892 r270 bottom
C62 "GCM155R71H221KA37J" FP-GCM155-0_05-IPC_B#2 -50.536,1.259 r270 bottom
C63 "GRM033C71C104ME14J" FP-GRM033-0_03-IPC_C#2 -49.088,-5.548 r90 bottom
C64 "GCM155R71H103KA55W" FP-GCM155-0_05-MFG#2 -54.473,-3.516 r270 bottom
C65 "GCM188D70G106ME36J" FP-GCM188-0_2-IPC_A#1 -53.711,-8.799 r180 bottom
C66 "GCM155R71H221KA37J" FP-GCM155-0_05-IPC_B#2 -57.317,-3.389 r270 bottom
C67 "GCM155R71H221KA37J" FP-GCM155-0_05-IPC_B#3 -50.967,-7.732 r270 bottom
C68 "GCM188C71A225KE02D" FP-GCH188-0_1-e0_2_0_5-MFG#2 32.639,-37.186 r90 top
C69 "GCM188C71A225KE02D" FP-GCH188-0_1-e0_2_0_5-MFG#3 29.616,-33.63 r270 top
C70 "GCM188C71A225KE02D" FP-GCH188-0_1-e0_2_0_5-MFG#2 23.063,-34.29 r0 top
C71 "GCM188C71A225KE02D" FP-GCH188-0_1-e0_2_0_5-MFG#2 22.098,-29.083 r270 top
C72 "GCM32EC71A476KE02K" FP-GCM32E-0_3-MFG 19.304,-35.052 r90 top
C73 "GCM32EC71A476KE02K" FP-GCM32E-0_3-MFG 16.129,-35.052 r90 top
C74 "GCM32EC71A476KE02K" FP-GCM32E-0_3-MFG 16.129,-29.972 r270 top
C75 "GCM32EC71A476KE02K" FP-GCM32E-0_3-MFG 19.304,-29.972 r270 top
C76 "GCM188C71A225KE02D" FP-GCH188-0_1-e0_2_0_5-MFG#2 30.988,-31.242 r270 top
C77 "GCM155R71H104ME02J" FP-GCM155-0_05-IPC_A#1 41.91,7.62 r315 bottom
C78 "GCM188C71A225KE02D" FP-GCH188-0_1-e0_2_0_5-MFG#2 34.036,5.334 r90 top
C79 "GCM155R71H104ME02J" FP-GCM155-0_05-IPC_A#4 39.116,11.938 r90 top
C80 "GCM155R71H104ME02J" FP-GCM155-0_05-IPC_A#5 39.116,5.08 r45 bottom
C81 "GCM188C71A225KE02D" FP-GCH188-0_1-e0_2_0_5-MFG#2 37.617,2.794 r270 top
C82 "GCM155R71H104ME02J" FP-GCM155-0_05-IPC_A#6 48.616,-4.699 r90 top
C83 "GCM155R71H104ME02J" FP-GCM155-0_05-IPC_A#6 47.142,-4.699 r90 top
C84 "GCM155R71H104ME02J" FP-GCM155-0_05-IPC_A#1 39.323,-2.489 r0 top
C85 "GCM155R71H104ME02J" FP-GCM155-0_05-IPC_A#3 12.014,1.702 r270 top
C86 "GCM188C71A225KE02D" FP-GCH188-0_1-e0_2_0_5-MFG#3 13.462,9.042 r270 top
C87 "GCM155R71H104ME02J" FP-GCM155-0_05-IPC_A#3 8.788,-13.132 r0 top
C88 "GCM155R71H104ME02J" FP-GCM155-0_05-IPC_A#7 -16.434,-7.823 r270 top
C89 "GCM155R71H104ME02J" FP-GCM155-0_05-IPC_A#7 -15.138,-7.849 r270 top
C90 "GCM155R71H104ME02J" FP-GCM155-0_05-IPC_A#7 -13.818,-7.849 r270 top
C91 "GCM155R71H104ME02J" FP-GCM155-0_05-IPC_A#3 -13.843,7.061 r90 top
C92 "GCM188C71A225KE02D" FP-GCH188-0_1-e0_2_0_5-MFG#3 7.087,-13.691 r270 top
C93 "GCM188C71A225KE02D" FP-GCH188-0_1-e0_2_0_5-MFG#3 9.677,7.518 r180 bottom
C94 "GCM188C71A225KE02D" FP-GCH188-0_1-e0_2_0_5-MFG#2 6.248,2.629 r270 bottom
C95 "GCM155R71H104ME02J" FP-GCM155-0_05-IPC_A#1 4.089,2.565 r270 bottom
C96 "GCM155R71H104ME02J" FP-GCM155-0_05-IPC_A#1 4.089,0.25 r270 bottom
C97 "GCM155R71H104ME02J" FP-GCM155-0_05-IPC_A#1 4.115,-2.341 r270 bottom
C98 "GCM155R71H104ME02J" FP-GCM155-0_05-IPC_A#1 -5.817,2.464 r270 bottom
C99 "GCM155R71H104ME02J" FP-GCM155-0_05-IPC_A#1 -5.918,-2.591 r270 bottom
C100 "GCM155R71H104ME02J" FP-GCM155-0_05-IPC_A#1 -7.391,2.485 r270 bottom
C101 "GCM155R71H104ME02J" FP-GCM155-0_05-IPC_A#1 -8.077,-2.591 r270 bottom
C102 "GCM188C71A225KE02D" FP-GCH188-0_1-e0_2_0_5-MFG#2 2.946,4.699 r0 bottom
C103 "GCM155R71H104ME02J" FP-GCM155-0_05-IPC_A#1 28.335,-19.12 r135 top
C104 "GCM188C71A225KE02D" FP-GCH188-0_1-e0_2_0_5-MFG#2 51.638,-16.764 r270 bottom
C105 "GCM155R71H104ME02J" FP-GCM155-0_05-IPC_A#1 53.34,-16.713 r270 bottom
C106 "GRM033C71C104ME14J" FP-GRM033-0_03-IPC_C#1 -37.262,-15.799 r270 top
C107 "GRM033C71C104ME14J" FP-GRM033-0_03-IPC_C#1 -37.287,-17.576 r90 top
C108 "GCM155R71H104ME02J" FP-GCM155-0_05-IPC_A#8 -52.244,-24.943 r0 bottom
C109 "GCM155R71H104ME02J" FP-GCM155-0_05-IPC_A#8 -35.458,-24.968 r0 bottom
C110 "GCM155R71H104ME02J" FP-GCM155-0_05-IPC_A#1 -52.248,-23.419 r180 bottom
C111 "GCM155R71H104ME02J" FP-GCM155-0_05-IPC_A#8 -35.458,-23.292 r180 bottom
C112 "GCM155R71H104ME02J" FP-GCM155-0_05-IPC_A#8 -48.18,-24.943 r0 bottom
C113 "GCM155R71H104ME02J" FP-GCM155-0_05-IPC_A#8 -31.492,-25.019 r0 bottom
C114 "GCM155R71H104ME02J" FP-GCM155-0_05-IPC_A#8 -48.18,-23.393 r180 bottom
C115 "GCM155R71H104ME02J" FP-GCM155-0_05-IPC_A#8 -31.496,-23.393 r180 bottom
C116 "GCM155R71H104ME02J" FP-GCM155-0_05-IPC_A#8 -44.09,-24.994 r0 bottom
C117 "GCM155R71H104ME02J" FP-GCM155-0_05-IPC_A#8 -27.377,-24.968 r0 bottom
C118 "GCM155R71H104ME02J" FP-GCM155-0_05-IPC_A#8 -44.094,-23.419 r180 bottom
C119 "GCM155R71H104ME02J" FP-GCM155-0_05-IPC_A#8 -27.381,-23.368 r180 bottom
C120 "GCM155R71H104ME02J" FP-GCM155-0_05-IPC_A#8 -40.056,-24.968 r0 bottom
C121 "GCM155R71H104ME02J" FP-GCM155-0_05-IPC_A#8 -23.19,-25.019 r0 bottom
C122 "GCM155R71H104ME02J" FP-GCM155-0_05-IPC_A#8 -40.052,-23.343 r180 bottom
C123 "GCM155R71H104ME02J" FP-GCM155-0_05-IPC_A#8 -23.19,-23.368 r180 bottom
C124 "GCM155R71H104ME02J" FP-GCM155-0_05-IPC_A#1 1.041,-22.534 r270 top
C125 "GCM155R71H104ME02J" FP-GCM155-0_05-IPC_A#1 3.708,-22.53 r270 top
C126 "GCM155R71H104ME02J" FP-GCM155-0_05-IPC_A#1 6.452,-22.551 r270 top
C129 "GCM155R71H104ME02J" FP-GCM155-0_05-IPC_A#1 45.212,22.352 r90 bottom
D1 "BAT165AX" BAT165AX 32.766,-30.734 r90 top
D2 "SML-P13PTT86R" FP-SML-P1-MFG 9.017,23.749 r180 top
D3 "SZESD8472MUT5G" FP-152AF-MFG -16.256,26.721 r270 top
D4 "SZESD8472MUT5G" FP-152AF-MFG -12.7,20.955 r180 top
D5 "BAT165AX" BAT165AX 36.347,-34.569 r270 top
D7 "CG0402MLC-3.3LG" CG0402MLC-3.3LG 40.513,25.527 r180 bottom
D8 "CG0402MLC-3.3LG" CG0402MLC-3.3LG 43.053,25.527 r0 bottom
FB1 "BLM15BX102SZ1D" FP-BLM15-0_05-MFG -15.748,-6.121 r180 top
FB2 "MPZ1005S121ET000" FP-MPZ1005-MFG#1 34.468,-31.877 r180 top
FB3 "MPZ1005S121ET000" FP-MPZ1005-MFG#2 48.006,-2.896 r180 top
IC1 "USB3318C-CP-TR" QFN50P400X400X100-25N-D 40.183,6.096 r45 top
IC2 "NX3DV42GU,115" QFN40P140X180X50-10N 40.005,-0.025 r180 top
IC3 "TLV320AIC3104IRHBR" TLV320AIC3104IRHBR -26.152,15.29 r270 top
IC4 "TLV9161IDBVR" SOT95P280X145-5N#1 -51.577,4.155 r0 bottom
IC5 "TLV9161IDBVR" SOT95P280X145-5N#2 -51.755,-4.811 r0 bottom
IC6 "TLV9161IDBVR" SOT95P280X145-5N#1 -51.806,20.436 r0 bottom
IC7 "TLV9161IDBVR" SOT95P280X145-5N#1 -51.755,12.156 r0 bottom
IC8 "TLV9161IDBVR" SOT95P280X145-5N#1 -41.893,-3.551 r270 bottom
IC9 "TLV9161IDBVR" SOT95P280X145-5N#1 -37.169,-3.474 r270 bottom
IC10 "IS25LP080D-JNLE-TR" SOIC127P600X175-8N 24.006,-19.748 r315 top
IC11 "IS42S16800J-7BLI-TR" IS42S16800J-7BLI-TR -0.96,-0.313 r90 bottom
IC12 "TLV9161IDBVR" SOT95P280X145-5N#1 -39.929,-16.637 r0 top
IC13 "TLV9161IDBVR" SOT95P280X145-5N#2 -51.765,-27.788 r270 bottom
IC14 "TLV9161IDBVR" SOT95P280X145-5N#2 -34.976,-27.915 r270 bottom
IC15 "TLV9161IDBVR" SOT95P280X145-5N#2 -47.701,-27.813 r270 bottom
IC16 "TLV9161IDBVR" SOT95P280X145-5N#2 -30.886,-27.94 r270 bottom
IC17 "TLV9161IDBVR" SOT95P280X145-5N#2 -43.612,-27.889 r270 bottom
IC18 "TLV9161IDBVR" SOT95P280X145-5N#2 -26.746,-27.965 r270 bottom
IC19 "TLV9161IDBVR" SOT95P280X145-5N#2 -39.497,-27.889 r270 bottom
IC20 "TLV9161IDBVR" SOT95P280X145-5N#2 -22.53,-27.965 r270 bottom
IC21 "SP3494CN-L_TR" SOIC127P600X175-8N 41.656,19.99 r90 bottom
J1 "217179-0001" FP-2171790001-MFG 53.238,-0.025 r90 top
J2 "3-794627-4" 37946274 25.856,24.185 r180 top
J3 "FTSH-107-01-F-DV-K" FP-FTSH-107-01-F-DV-K-MFG -0.076,24.689 r0 top
J4 "MSD-12-A" MSD12A 47.981,-15.189 r270 top
J5 "RASM742TRX" RASM742TRX 44.096,-34.74 r180 top
J6 "5-794627-4" 57946274 -33.959,-34.034 r0 top
J7 "4-794627-0" 47946270 1.47,-34.878 r0 top
J8 "3-794627-4" 37946274 41.655,24.108 r180 top
J9 "4-794629-6" 47946296 -66.096,6.682 r270 top
NT1 "NetTie_SMD" NETTIE_SMD 10.795,-5.512 r180 top net-tie
NT2 "NetTie_SMD" NETTIE_SMD -5.639,9.423 r90 top net-tie
NT3 "NetTie_SMD" NETTIE_SMD -10.541,4.013 r180 top net-tie
NT4 "NetTie_SMD" NETTIE_SMD 10.82,-5.004 r180 top net-tie
NT5 "NetTie_SMD" NETTIE_SMD -6.121,9.423 r90 top net-tie
NT6 "NetTie_SMD" NETTIE_SMD -10.541,3.505 r180 top net-tie
NT7 "NetTie_SMD" NETTIE_SMD -12.573,8.509 r0 top net-tie
NT8 "NetTie_SMD" NETTIE_SMD -10.541,2.997 r180 top net-tie
NT9 "NetTie_SMD" NETTIE_SMD 10.922,-4.496 r180 top net-tie
NT10 "NetTie_SMD" NETTIE_SMD -10.541,2.515 r180 top net-tie
NT11 "NetTie_SMD" NETTIE_SMD 10.795,0.508 r180 top net-tie
NT12 "NetTie_SMD" NETTIE_SMD -10.541,2.007 r180 top net-tie
NT13 "NetTie_SMD" NETTIE_SMD -10.541,7.01 r180 top net-tie
NT14 "NetTie_SMD" NETTIE_SMD -10.516,-0.508 r180 top net-tie
NT15 "NetTie_SMD" NETTIE_SMD -9.627,-9.906 r270 top net-tie
NT16 "NetTie_SMD" NETTIE_SMD -10.541,1.499 r180 top net-tie
NT17 "NetTie_SMD" NETTIE_SMD -10.541,6.528 r180 top net-tie
NT18 "NetTie_SMD" NETTIE_SMD -5.131,-9.906 r270 top net-tie
NT19 "NetTie_SMD" NETTIE_SMD -3.124,-9.906 r270 top net-tie
NT20 "NetTie_SMD" NETTIE_SMD -10.541,8.001 r180 top net-tie
NT21 "NetTie_SMD" NETTIE_SMD -4.623,-9.906 r270 top net-tie
NT22 "NetTie_SMD" NETTIE_SMD -1.626,-9.906 r270 top net-tie
NT23 "NetTie_SMD" NETTIE_SMD 8.788,2.515 r0 top net-tie
NT24 "NetTie_SMD" NETTIE_SMD 6.375,-9.906 r270 top net-tie
NT25 "NetTie_SMD" NETTIE_SMD -1.143,-9.906 r270 top net-tie
NT26 "NetTie_SMD" NETTIE_SMD -10.541,7.493 r180 top net-tie
NT27 "NetTie_SMD" NETTIE_SMD 6.858,-9.906 r270 top net-tie
NT28 "NetTie_SMD" NETTIE_SMD -0.635,-9.906 r270 top net-tie
NT29 "NetTie_SMD" NETTIE_SMD 10.795,-8.992 r180 top net-tie
NT30 "NetTie_SMD" NETTIE_SMD -0.127,-9.906 r270 top net-tie
NT31 "NetTie_SMD" NETTIE_SMD -0.61,11.405 r270 top net-tie
NT32 "NetTie_SMD" NETTIE_SMD 10.795,-8.484 r180 top net-tie
NT33 "NetTie_SMD" NETTIE_SMD 0.356,-9.906 r270 top net-tie
NT34 "NetTie_SMD" NETTIE_SMD -1.143,11.405 r270 top net-tie
NT35 "NetTie_SMD" NETTIE_SMD -5.132,11.473 r270 top net-tie
NT36 "NetTie_SMD" NETTIE_SMD 0.864,9.423 r90 top net-tie
NT37 "NetTie_SMD" NETTIE_SMD -7.62,-11.938 r90 top net-tie
NT38 "NetTie_SMD" NETTIE_SMD 1.372,11.532 r270 top net-tie
NT39 "NetTie_SMD" NETTIE_SMD -10.541,-8.509 r180 top net-tie
NT40 "NetTie_SMD" NETTIE_SMD 10.795,-2.007 r180 top net-tie
NT41 "NetTie_SMD" NETTIE_SMD -10.541,-8.992 r180 top net-tie
NT42 "NetTie_SMD" NETTIE_SMD -10.541,-4.978 r180 top net-tie
NT43 "NetTie_SMD" NETTIE_SMD 0.356,9.423 r90 top net-tie
NT44 "NetTie_SMD" NETTIE_SMD -7.137,-9.906 r270 top net-tie
NT45 "NetTie_SMD" NETTIE_SMD -10.541,-3.988 r180 top net-tie
NT46 "NetTie_SMD" NETTIE_SMD 8.788,-0.991 r0 top net-tie
NT47 "NetTie_SMD" NETTIE_SMD -0.127,9.423 r90 top net-tie
NT48 "NetTie_SMD" NETTIE_SMD -10.541,-4.496 r180 top net-tie
NT49 "NetTie_SMD" NETTIE_SMD -10.541,-5.486 r180 top net-tie
NT50 "NetTie_SMD" NETTIE_SMD 8.788,-0.483 r0 top net-tie
NT51 "NetTie_SMD" NETTIE_SMD -10.541,0 r180 top net-tie
NT52 "NetTie_SMD" NETTIE_SMD -10.541,-0.991 r180 top net-tie
NT53 "NetTie_SMD" NETTIE_SMD -10.541,-1.499 r180 top net-tie
NT54 "NetTie_SMD" NETTIE_SMD -10.541,-1.981 r180 top net-tie
NT55 "NetTie_SMD" NETTIE_SMD -5.639,-9.906 r270 top net-tie
NT56 "NetTie_SMD" NETTIE_SMD 6.858,9.423 r90 top net-tie
NT57 "NetTie_SMD" NETTIE_SMD 6.375,9.423 r90 top net-tie
NT58 "NetTie_SMD" NETTIE_SMD -6.121,-9.906 r270 top net-tie
NT59 "NetTie_SMD" NETTIE_SMD 5.842,9.423 r90 top net-tie
NT60 "NetTie_SMD" NETTIE_SMD 10.719,5.994 r180 top net-tie
NT61 "NetTie_SMD" NETTIE_SMD 3.353,9.423 r90 top net-tie
NT62 "NetTie_SMD" NETTIE_SMD -3.632,-9.906 r270 top net-tie
NT63 "NetTie_SMD" NETTIE_SMD 10.719,6.502 r180 top net-tie
NT64 "NetTie_SMD" NETTIE_SMD 2.87,9.423 r90 top net-tie
NT65 "NetTie_SMD" NETTIE_SMD -3.632,9.423 r90 top net-tie
NT66 "NetTie_SMD" NETTIE_SMD 8.788,-7.493 r0 top net-tie
NT67 "NetTie_SMD" NETTIE_SMD -10.541,5.512 r180 top net-tie
NT68 "NetTie_SMD" NETTIE_SMD -6.629,-9.906 r270 top net-tie
NT69 "NetTie_SMD" NETTIE_SMD 3.861,9.423 r90 top net-tie
NT70 "NetTie_SMD" NETTIE_SMD 10.795,-1.499 r180 top net-tie
NT71 "NetTie_SMD" NETTIE_SMD 8.788,-2.997 r0 top net-tie
NT72 "NetTie_SMD" NETTIE_SMD 8.788,-2.489 r0 top net-tie
NT73 "NetTie_SMD" NETTIE_SMD -7.645,9.423 r90 top net-tie
NT74 "NetTie_SMD" NETTIE_SMD 5.359,9.423 r90 top net-tie
NT75 "NetTie_SMD" NETTIE_SMD -7.112,11.557 r270 top net-tie
NT76 "NetTie_SMD" NETTIE_SMD 4.877,9.423 r90 top net-tie
NT77 "NetTie_SMD" NETTIE_SMD 8.788,-8.001 r0 top net-tie
NT78 "NetTie_SMD" NETTIE_SMD 0.864,-9.906 r270 top net-tie
NT79 "NetTie_SMD" NETTIE_SMD 1.372,-9.906 r270 top net-tie
NT80 "NetTie_SMD" NETTIE_SMD 1.88,-9.906 r270 top net-tie
NT81 "NetTie_SMD" NETTIE_SMD 3.378,-9.906 r270 top net-tie
NT82 "NetTie_SMD" NETTIE_SMD 3.861,-9.881 r270 top net-tie
NT83 "NetTie_SMD" NETTIE_SMD 4.369,-9.881 r270 top net-tie
NT84 "NetTie_SMD" NETTIE_SMD 4.877,-9.881 r270 top net-tie
NT85 "NetTie_SMD" NETTIE_SMD 5.385,-9.881 r270 top net-tie
NT86 "NetTie_SMD" NETTIE_SMD 5.867,-9.881 r270 top net-tie
NT87 "NetTie_SMD" NETTIE_SMD 8.788,-6.985 r0 top net-tie
NT88 "NetTie_SMD" NETTIE_SMD 8.788,-6.502 r0 top net-tie
NT89 "NetTie_SMD" NETTIE_SMD 8.788,-5.994 r0 top net-tie
NT90 "NetTie_SMD" NETTIE_SMD -8.128,9.423 r90 top net-tie
NT91 "NetTie_SMD" NETTIE_SMD -8.636,9.423 r90 top net-tie
Q1 "2N7002H6327XTSA2" FP-PG-SOT23-3-MFG 8.23,26.416 r0 top
R1 "RC0402FR-07100KL" RESC1005X40X25NL05T10#1 5.893,26.416 r270 top
R2 "RMCF0402ZT0R00" FP-RMCF0402-MFG 23.978,-37.744 r270 top
R3 "RC0402JR-075K1L" RESC1005X40X25ML05T10#1 36.068,4.801 r0 top
R4 "RC0402JR-0747KL" RESC1005X40X25LL05T10#1 40.64,10.16 r0 top
R5 "RC0402JR-13150RL" RESC1005X40X25LL05T10#2 6.655,23.673 r180 top
R6 "RC0402JR-1333RL" RESC1005X40X25ML05T10#2 36.83,9.144 r180 top
R7 "RC0402FR-07806KL" RESC1005X40X25NL05T10#2 36.398,6.833 r45 top
R8 "RMCF0402ZT0R00" FP-RMCF0402-MFG 22.631,-37.744 r90 top
R9 "RC0402JR-075K1L" RESC1005X40X25ML05T10#1 42.266,-1.651 r90 top
R10 "RC0402JR-075K1L" RESC1005X40X25ML05T10#3 47.981,1.575 r0 top
R11 "RC0402JR-075K1L" RESC1005X40X25ML05T10#3 47.981,-1.676 r0 top
R12 "RC0402FR-1310KL" FP-RC0402-0_4-IPC_A#1 -10.058,20.625 r180 top
R13 "RC0402JR-0747KL" RESC1005X40X25LL05T10#3 24.635,-15.958 r315 top
R14 "RC1005J472CS" FP-RC1005-IPC_C -33.807,18.479 r90 bottom
R15 "RC1005J472CS" FP-RC1005-IPC_C -35.179,18.479 r90 bottom
R16 "RC0402JR-071ML" FP-RC0402-0_4-IPC_A#2 -55.158,19.243 r180 bottom
R17 "RC0402JR-07100RL" RESC1005X40X25NL05T10#2 -59.121,20.944 r90 bottom
R18 "AC0402JR-071KL" FP-AC0402-IPC_C#1 -52.621,1.717 r0 bottom
R19 "RC0402JR-071ML" FP-RC0402-0_4-IPC_A#2 -56.403,20.97 r90 bottom
R20 "RC0402JR-071ML" FP-RC0402-0_4-IPC_A#2 -55.057,11.089 r180 bottom
R21 "RC0402JR-07100RL" RESC1005X40X25NL05T10#2 -58.511,12.994 r90 bottom
R22 "AC0402JR-071KL" FP-AC0402-IPC_C#2 -52.847,-7.275 r0 bottom
R23 "RC0402JR-071ML" FP-RC0402-0_4-IPC_A#2 -55.92,13.02 r90 bottom
R24 "AC0402JR-071KL" FP-AC0402-IPC_C#1 -59.385,-11.356 r90 bottom
R25 "AC0402JR-071KL" FP-AC0402-IPC_C#1 -57.836,-11.351 r270 bottom
R26 "RC0402JR-071ML" FP-RC0402-0_4-IPC_A#2 -42.793,1.063 r270 bottom
R27 "AC0402JR-071KL" FP-AC0402-IPC_C#1 -40.964,1.014 r270 bottom
R28 "RC0402JR-07100RL" RESC1005X40X25NL05T10#2 -41.015,-6.934 r270 bottom
R29 "RC0402FR-1310KL" FP-RC0402-0_4-IPC_A#2 -40.786,-9.427 r270 bottom
R30 "RC0402JR-071ML" FP-RC0402-0_4-IPC_A#2 -38.322,1.067 r270 bottom
R31 "AC0402JR-071KL" FP-AC0402-IPC_C#1 -36.341,1.293 r270 bottom
R32 "RC0402JR-07100RL" RESC1005X40X25NL05T10#2 -36.214,-6.941 r270 bottom
R33 "RC0402FR-1310KL" FP-RC0402-0_4-IPC_A#2 -36.062,-9.427 r270 bottom
R34 "RMCF0402ZT0R00" FP-RMCF0402-MFG -30.912,9.533 r270 bottom
R35 "RC0402JR-0750RL" FP-RC0402-0_4-MFG -35.077,12.081 r270 bottom
R36 "RC0402FR-1310KL" FP-RC0402-0_4-IPC_A#2 -36.576,16.069 r0 bottom
R37 "RC0402FR-1310KL" FP-RC0402-0_4-IPC_A#2 -36.576,14.342 r0 bottom
R38 "RC0402JR-071ML" FP-RC0402-0_4-IPC_A#3 -54.9,3.114 r180 bottom
R39 "RC0402JR-07100RL" RESC1005X40X25NL05T10#2 -58.486,4.942 r90 bottom
R40 "AC0402JR-071KL" FP-AC0402-IPC_C#1 -52.72,18.023 r0 bottom
R41 "RC0402JR-071ML" FP-RC0402-0_4-IPC_A#3 -55.793,4.892 r90 bottom
R42 "RC0402JR-071ML" FP-RC0402-0_4-IPC_A#4 -55.031,-5.243 r180 bottom
R43 "RC0402JR-07100RL" RESC1005X40X25NL05T10#2 -58.664,-3.44 r90 bottom
R44 "AC0402JR-071KL" FP-AC0402-IPC_C#1 -52.591,9.692 r0 bottom
R45 "RC0402JR-071ML" FP-RC0402-0_4-IPC_A#5 -55.819,-3.414 r90 bottom
R46 "RC0402JR-0747KL" RESC1005X40X25LL05T10#3 31.191,-34.823 r90 top
R47 "RC0402JR-0747KL" RESC1005X40X25LL05T10#4 -0.381,11.176 r270 bottom
R48 "RC0402JR-0747KL" RESC1005X40X25LL05T10#3 31.217,-36.957 r90 top
R49 "RC0402JR-0747KL" RESC1005X40X25LL05T10#3 24.149,-32.461 r180 top
R50 "RC0402JR-0791KL" RESC1005X40X25LL05T10#3 24.149,-31.521 r0 top
R51 "RC0603JR-1310RL" RESC1608X55X25LL10T15 22.098,-31.75 r270 top
R52 "RC0402JR-0747KL" RESC1005X40X25LL05T10#3 24.613,-29.261 r270 top
R53 "RC0402JR-0715KL" RESC1005X40X25NL05T10#2 23.495,-29.337 r90 top
R54 "RC0402JR-0747KL" RESC1005X40X25LL05T10#4 -1.549,11.227 r270 bottom
R55 "RC0402JR-0747KL" RESC1005X40X25LL05T10#3 0.711,7.976 r225 bottom
R56 "RC0402JR-0747KL" RESC1005X40X25LL05T10#3 -0.787,8.204 r225 bottom
R57 "RC0402JR-0747KL" RESC1005X40X25LL05T10#3 -2.108,8.941 r225 bottom
R58 "RC0402JR-0747KL" RESC1005X40X25LL05T10#3 12.167,-2.896 r180 bottom
R59 "RC0402FR-1310KL" FP-RC0402-0_4-IPC_A#2 -43.891,-17.094 r90 top
R60 "RC0402JR-07100RL" RESC1005X40X25NL05T10#2 -36.17,-17.228 r90 top
R61 "RC0402JR-0747KL" RESC1005X40X25LL05T10#3 -42.57,-17.196 r270 top
R62 "RC0402JR-07100RL" RESC1005X40X25NL05T10#1 -50.47,-24.326 r270 bottom
R63 "RC0402JR-07100RL" RESC1005X40X25NL05T10#1 -33.807,-23.698 r270 bottom
R64 "RC0402JR-07100RL" RESC1005X40X25NL05T10#1 -46.406,-24.149 r270 bottom
R65 "RC0402JR-07100RL" RESC1005X40X25NL05T10#1 -29.794,-23.673 r270 bottom
R66 "RC0402JR-07100RL" RESC1005X40X25NL05T10#1 -42.443,-24.333 r270 bottom
R67 "RC0402JR-07100RL" RESC1005X40X25NL05T10#1 -25.679,-23.622 r270 bottom
R68 "RC0402JR-1333RL" RESC1005X40X25ML05T10#1 -4.14,-13.513 r90 top
R69 "RC0402JR-1333RL" RESC1005X40X25ML05T10#1 5.766,-3.581 r45 bottom
R70 "RC0402JR-07100RL" RESC1005X40X25NL05T10#1 -38.303,-24.25 r270 bottom
R71 "RC0402JR-07100RL" RESC1005X40X25NL05T10#1 -21.514,-23.825 r270 bottom
R72 "RC0402FR-1310KL" FP-RC0402-0_4-IPC_A#2 -3.988,-19.841 r90 top
R73 "RC0402FR-1310KL" FP-RC0402-0_4-IPC_A#2 -1.448,-19.837 r90 top
R74 "RC0402FR-1310KL" FP-RC0402-0_4-IPC_A#2 1.067,-19.837 r90 top
R75 "RC0402FR-1310KL" FP-RC0402-0_4-IPC_A#2 3.734,-19.816 r90 top
R76 "RC0402FR-1310KL" FP-RC0402-0_4-IPC_A#2 6.452,-19.837 r90 top
R77 "RC0402JR-07390RL" RESC1005X40X25ML05T10#1 39.624,24.257 r180 bottom
R78 "RC0402FR-07120RL" RESC1005X40X25NL05T10#2 41.732,24.157 r180 bottom
R79 "RC0402JR-07390RL" RESC1005X40X25ML05T10#1 43.815,24.257 r180 bottom
RV1 "CG0402MLU-12G" VARC1005X41N#1 -59.73,5.12 r270 bottom
RV2 "CG0402MLU-12G" VARC1005X41N#1 -59.908,-3.338 r270 bottom
RV3 "CG0402MLU-12G" VARC1005X41N#1 -60.34,21.071 r270 bottom
RV4 "CG0402MLU-12G" VARC1005X41N#1 -59.68,13.112 r270 bottom
RV5 "CG0402MLU-12G" VARC1005X41N#1 -42.446,-11.811 r0 bottom
RV6 "CG0402MLU-12G" VARC1005X41N#1 -37.645,-11.786 r0 bottom
RV7 "CG0402MLU-12G" VARC1005X41N#2 36.347,-37.906 r90 top
RV8 "CG0402MLU-12G" VARC1005X41N#3 48.539,3.226 r270 top
S1 "PCM12SMTBR" PCM12SMTBR -10.211,24.994 r180 top
SW1 "KMR421NG LFS" FP-KMR421NG_LFS-MFG -18.377,24.493 r270 top
U1 "STM32H723ZGT6" FP-LQFP144-1A-IPC_A -0.882,-0.24 r0 top
U2 "TLV76733QWDRBRQ1" FP-DRB0008J-IPC_C 26.797,-37.719 r0 top
U4 "NCP718BSNADJT1G" FP-419AE-01-IPC_C 26.899,-33.401 r180 top
U5 "NCP718BSNADJT1G" FP-419AE-01-IPC_C 26.924,-29.82 r180 top
Y1 "ABM8G-25.000MHZ-18-D2Y-T3" FP-ABM8G-MFG -16.106,-2.877 r315 bottom
Y2 "ECS-.327-6-34QCN-TR" FP-ECX-34Q-MFG -15.875,3.759 r270 top
Y3 "ECS-2520MV-130-BN-TR" ECS2520MV130BNTR 36.617,11.535 r270 top

## Footprints (in the part's own frame and the unit in brackets; to place one, negate y for a bottom-side part, rotate by r counter-clockwise, add the part's x,y. Pads: shape width x height; smd on the part's side, far side on the other; paste and mask are expansions set on the pad)
37946274 [mm]
  rect 1.27x2.92 smd: 1(1.5,3.255) 2(1.5,7.875) 3(-1.5,3.255) 4(-1.5,7.875)
  rect 2.92x1.27 smd: 5(-5.395,-2.225) 6(5.395,-2.225)
  silkscreen extent -5,-7.88 5,4.38, body extent -6.56,-6.85 6.56,8.78, height 8.67
47946270 [mm]
  rect 1.27x2.92 smd: 1(6,3.255) 2(6,7.875) 3(3,3.255) 4(3,7.875) 5(0,3.255) 6(0,7.875) 7(-3,3.255) 8(-3,7.875) 9(-6,3.255) 10(-6,7.875)
  rect 3.43x1.65 smd: MP1(9.895,-2.225) MP2(-9.895,-2.225)
  silkscreen extent -7.93,-7.88 9.1,6.42, body extent -11.05,-6.82 11.05,8.81, height 8.67
47946296 [mm]
  rect 1.27x2.92 smd: 1(10.5,11.13) 2(7.5,11.13) 3(4.5,11.13) 4(1.5,11.13) 5(-1.5,11.13) 6(-4.5,11.13) 7(-7.5,11.13) 8(-10.5,11.13) 9(10.5,15.75) 10(7.5,15.75) 11(4.5,15.75) 12(1.5,15.75) 13(-1.5,15.75) 14(-4.5,15.75) 15(-7.5,15.75) 16(-10.5,15.75)
  rect 3.43x1.65 smd: 17(14.395,5.65) 18(-14.395,5.65)
  silkscreen extent -12.43,0 12.43,11.2, body extent -15.52,0.96 15.52,16.59, height 8.67
57946274 [mm]
  rect 1.27x2.92 smd: 1(16.5,2.455) 2(16.5,7.075) 3(13.5,2.455) 4(13.5,7.075) 5(10.5,2.455) 6(10.5,7.075) 7(7.5,2.455) 8(7.5,7.075) 9(4.5,2.455) 10(4.5,7.075) 11(1.5,2.455) 12(1.5,7.075) 13(-1.5,2.455) 14(-1.5,7.075) 15(-4.5,2.455) 16(-4.5,7.075) 17(-7.5,2.455) 18(-7.5,7.075) 19(-10.5,2.455) 20(-10.5,7.075) 21(-13.5,2.455) 22(-13.5,7.075) 23(-16.5,2.455) 24(-16.5,7.075)
  rect 3.43x1.65 smd: MP1(20.395,-3.025) MP2(-20.395,-3.025)
  silkscreen extent -18.43,-8.53 20.1,3.47, body extent -21.55,-7.5 21.55,8.13, height 8.67
BAT165AX [mil]
  rrect50% 24x24 smd: 1(-43.31,0) 2(43.31,0)
  silkscreen extent -75,-25 33,25, body extent -49,-25 49,25, height 36
CG0402MLC-3.3LG [mm]
  rrect50% 0.51x0.51 smd: 1(-0.5,0) 2(0.5,0)
  silkscreen extent -1.2,-0.5 1.1,0.5, body extent -0.5,-0.18 0.5,0.18, height 0.5
ECS2520MV130BNTR [mm]
  rect 0.9x0.8 smd: 1(-0.925,-0.725) 2(0.925,-0.725) 3(0.925,0.725) 4(-0.925,0.725)
  silkscreen extent -2,-0.77 -1.9,-0.68, body extent -1.25,-1 1.25,1, height 0.9
FP-152AF-MFG [mm]
  rrect50% 0.254x0.3 smd paste+0 mask+0: 1(-0.215,0) 2(0.215,0)
  silkscreen extent -0.33,-0.38 0.34,0.38, body extent -0.47,-0.28 0.47,0.28, height 0.25
FP-419AE-01-IPC_C [mm]
  rrect50% 0.94x0.486 smd paste+0 mask+0: 1(-1.115,0.95) 2(-1.115,0) 3(-1.115,-0.95) 4(1.116,-0.95) 5(1.116,0.95)
  silkscreen extent -2.21,-1.45 0.8,1.45, body extent -1.69,-1.55 1.69,1.55, height 0.25
FP-2171790001-MFG [mm]
  rrect100% 1x1.8 hole 1.4 slot 0.6 at 0 deg paste-2539.97 mask+0: 1(-4.32,2.85) 2(4.32,2.85)
  rrect100% 1x2.2 hole 1.8 slot 0.6 at 0 deg paste-2539.97 mask+0: 3(-4.32,-1.15) 4(4.32,-1.15)
  rrect25% 0.6x1.15 smd paste+0 mask+0: A1-B12(-3.2,3.425) A4-B9(-2.4,3.425) B1-A12(3.2,3.425) B4-A9(2.4,3.425)
  rrect25% 0.3x1.15 smd paste+0 mask+0: A5(-1.25,3.425) A6(-0.25,3.425) A7(0.25,3.425) A8(1.25,3.425) B5(1.75,3.425) B6(0.75,3.425) B7(-0.75,3.425) B8(-1.75,3.425)
  silkscreen extent -4.57,-3.35 4.57,4.7, body extent -4.92,-3.45 4.92,4.1, height 0.25
FP-ABM8G-MFG [mm]
  rrect50% 1.4x1.2 smd paste+0 mask+0: 1(-1.1,-0.85) 2(1.1,-0.85) 3(1.1,0.85) 4(-1.1,0.85)
  silkscreen extent -2.34,-2.02 1.6,1.82, body extent -1.6,-1.25 1.6,1.25, height 1
FP-AC0402-IPC_C#1 [mm]
  rect 0.515x0.472 smd paste+0 mask+0: 1(-0.379,0) 2(0.379,0)
  silkscreen extent -0.63,-0.48 0.64,0.51, body extent -0.5,-0.25 0.5,0.25, height 0.37
FP-AC0402-IPC_C#2 [mm]
  rrect25% 0.515x0.472 smd paste+0 mask+0: 1(-0.379,0) 2(0.379,0)
  silkscreen extent -0.64,-0.46 0.64,0.46, body extent -0.5,-0.25 0.5,0.25, height 0.37
FP-BLM15-0_05-MFG [mm]
  rrect50% 0.4x0.5 smd paste+0 mask+0: 1(-0.4,0) 2(0.4,0)
  silkscreen extent -0.51,-0.38 0.54,0.38, body extent -0.7,-0.38 0.7,0.38, height 0.25
FP-DRB0008J-IPC_C [mm]
  rect 0.731x0.302 smd paste+0 mask+0: 1(-1.391,0.975)
  rrect100% 0.731x0.302 smd paste+0 mask+0: 2(-1.391,0.325) 3(-1.391,-0.325) 4(-1.391,-0.975) 5(1.391,-0.975) 6(1.391,-0.325) 7(1.391,0.325) 8(1.391,0.975)
  rect 1.75x2.5 smd paste-1000 mask+0: 9(0,0)
  silkscreen extent -2.28,-1.5 1.5,1.5, body extent -1.86,-1.6 1.86,1.6, height 0.25
FP-ECX-34Q-MFG [mm]
  rrect50% 1.1x1.9 smd paste+0 mask+0: 1(-1.25,0) 2(1.25,0)
  silkscreen extent -0.28,-0.8 0.28,0.8, body extent -1.9,-1.05 1.9,1.05, height 0.25
FP-FTSH-107-01-F-DV-K-MFG [mm]
  rrect50% 0.74x2.79 smd paste+0 mask+0: 1(-3.81,-2.035) 2(-3.81,2.035) 3(-2.54,-2.035) 4(-2.54,2.035) 5(-1.27,-2.035) 6(-1.27,2.035) 7(0,-2.035) 8(0,2.035) 9(1.27,-2.035) 10(1.27,2.035) 11(2.54,-2.035) 12(2.54,2.035) 13(3.81,-2.035) 14(3.81,2.035)
  silkscreen extent -4.51,-4.11 4.51,0.27, body extent -4.61,-3.53 4.61,3.53, height 0.25
FP-GCH188-0_1-e0_2_0_5-MFG#1 [mm]
  rrect25% 0.65x0.7 smd paste+0 mask+0: 1(-0.675,0) 2(0.675,0)
  silkscreen extent -0.79,-0.66 0.81,0.66, body extent -1.1,-0.55 1.1,0.55, height 0.25
FP-GCH188-0_1-e0_2_0_5-MFG#2 [mm]
  rect 0.65x0.7 smd paste+0 mask+0: 1(-0.675,0) 2(0.675,0)
  silkscreen extent -0.81,-0.66 0.79,0.69, body extent -1.1,-0.55 1.1,0.55, height 0.25
FP-GCH188-0_1-e0_2_0_5-MFG#3 [mm]
  rrect50% 0.65x0.7 smd paste+0 mask+0: 1(-0.675,0) 2(0.675,0)
  silkscreen extent -0.84,-0.69 0.79,0.69, body extent -1.1,-0.55 1.1,0.55, height 0.25
FP-GCM32E-0_3-MFG [mm]
  rect 1.1x2.05 smd paste+0 mask+0: 1(-1.65,0) 2(1.65,0)
  silkscreen extent -0.72,-1.35 0.72,1.35, body extent -1.6,-1.25 1.6,1.25, height 2.7
FP-GCM155-0_2-MFG [mm]
  rect 0.45x0.6 smd paste+0 mask+0: 1(-0.475,0) 2(0.475,0)
  silkscreen extent -0.61,-0.53 0.59,0.53, body extent -0.5,-0.25 0.5,0.25, height 0.7
FP-GCM155-0_05-IPC_A#1 [mm]
  rect 0.715x0.672 smd paste+0 mask+0: 1(-0.479,0) 2(0.479,0)
  silkscreen extent -0.86,-0.64 0.84,0.64, body extent -1.04,-0.54 1.04,0.54, height 0.25
FP-GCM155-0_05-IPC_A#2 [mm]
  rrect50% 0.559x0.672 smd paste+0 mask+0: 1(-0.479,0) 2(0.479,0)
  silkscreen extent -0.84,-0.64 0.84,0.64, body extent -1.04,-0.54 1.04,0.54, height 0.25
FP-GCM155-0_05-IPC_A#3 [mm]
  rrect50% 0.508x0.672 smd paste+0 mask+0: 1(-0.479,0) 2(0.479,0)
  silkscreen extent -0.74,-0.53 0.74,0.53, body extent -1.04,-0.54 1.04,0.54, height 0.25
FP-GCM155-0_05-IPC_A#4 [mm]
  rrect50% 0.635x0.672 smd paste+0 mask+0: 1(-0.479,0) 2(0.479,0)
  silkscreen extent -0.84,-0.63 0.83,0.66, body extent -0.5,-0.25 0.5,0.25, height 0.55
FP-GCM155-0_05-IPC_A#5 [mm]
  rrect20% 0.715x0.672 smd paste+0 mask+0: 1(-0.479,0) 2(0.479,0)
  silkscreen extent -0.84,-0.63 0.83,0.63, body extent -0.5,-0.25 0.5,0.25, height 0.55
FP-GCM155-0_05-IPC_A#6 [mm]
  rrect25% 0.61x0.672 smd paste+0 mask+0: 1(-0.479,0) 2(0.479,0)
  silkscreen extent -0.84,-0.58 0.84,0.58, body extent -1.04,-0.54 1.04,0.54, height 0.25
FP-GCM155-0_05-IPC_A#7 [mm]
  rrect50% 0.715x0.672 smd paste+0 mask+0: 1(-0.479,0) 2(0.479,0)
  silkscreen extent -0.83,-0.53 0.84,0.53, body extent -1.04,-0.54 1.04,0.54, height 0.25
FP-GCM155-0_05-IPC_A#8 [mm]
  rrect25% 0.715x0.672 smd paste+0 mask+0: 1(-0.479,0) 2(0.479,0)
  silkscreen extent -0.84,-0.58 0.83,0.58, body extent -0.5,-0.25 0.5,0.25, height 0.55
FP-GCM155-0_05-IPC_B#1 [mm]
  rrect50% 0.615x0.572 smd paste+0 mask+0: 1(-0.429,0) 2(0.429,0)
  silkscreen extent -0.76,-0.53 0.74,0.53, body extent -0.5,-0.25 0.5,0.25, height 0.55
FP-GCM155-0_05-IPC_B#2 [mm]
  rect 0.615x0.572 smd paste+0 mask+0: 1(-0.429,0) 2(0.429,0)
  silkscreen extent -0.74,-0.53 0.74,0.53, body extent -0.5,-0.25 0.5,0.25, height 0.55
FP-GCM155-0_05-IPC_B#3 [mm]
  rrect25% 0.559x0.572 smd paste+0 mask+0: 1(-0.429,0) 2(0.429,0)
  silkscreen extent -0.74,-0.53 0.74,0.51, body extent -0.5,-0.25 0.5,0.25, height 0.55
FP-GCM155-0_05-IPC_C#1 [mm]
  rrect50% 0.515x0.472 smd paste+0 mask+0: 1(-0.379,0) 2(0.379,0)
  silkscreen extent -0.66,-0.48 0.64,0.48, body extent -0.74,-0.38 0.74,0.38, height 0.25
FP-GCM155-0_05-IPC_C#2 [mm]
  rect 0.515x0.472 smd paste+0 mask+0: 1(-0.379,0) 2(0.379,0)
  silkscreen extent -0.66,-0.51 0.61,0.51, body extent -0.5,-0.25 0.5,0.25, height 0.55
FP-GCM155-0_05-MFG#1 [mm]
  rect 0.4x0.5 smd paste+0 mask+0: 1(-0.4,0) 2(0.4,0)
  silkscreen extent -0.5,-0.51 0.55,0.48, body extent -0.5,-0.25 0.5,0.25, height 0.55
FP-GCM155-0_05-MFG#2 [mm]
  rrect25% 0.4x0.5 smd paste+0 mask+0: 1(-0.4,0) 2(0.4,0)
  silkscreen extent -0.53,-0.46 0.52,0.48, body extent -0.5,-0.25 0.5,0.25, height 0.55
FP-GCM188-0_2-IPC_A#1 [mm]
  rect 1.305x1.106 smd paste+0 mask+0: 1(-0.801,0) 2(0.801,0)
  silkscreen extent -1.46,-0.81 1.5,0.84, body extent -0.8,-0.4 0.8,0.4, height 1
FP-GCM188-0_2-IPC_A#2 [mm]
  rrect20% 1.143x1.106 smd paste+0 mask+0: 1(-0.801,0) 2(0.801,0)
  silkscreen extent -1.45,-0.95 1.45,0.95, body extent -0.8,-0.4 0.8,0.4, height 1
FP-GRM21B-0_15-IPC_C [mm]
  rect 1.006x1.308 smd paste+0 mask+0: 1(-0.726,0) 2(0.726,0)
  silkscreen extent -1.23,-0.91 1.23,0.91, body extent -1.33,-0.8 1.33,0.8, height 0.25
FP-GRM033-0_03-IPC_C#1 [mm]
  rect 0.354x0.263 smd paste+0 mask+0: 1(-0.254,0) 2(0.254,0)
  silkscreen extent -0.43,-0.33 0.43,0.33, body extent -0.53,-0.27 0.53,0.26, height 0.25
FP-GRM033-0_03-IPC_C#2 [mm]
  rrect25% 0.354x0.263 smd paste+0 mask+0: 1(-0.254,0) 2(0.254,0)
  silkscreen extent -0.46,-0.36 0.41,0.38, body extent -0.3,-0.15 0.3,0.15, height 0.33
FP-GRM155-0_1-IPC_B [mm]
  rect 0.615x0.572 smd paste+0 mask+0: 1(-0.429,0) 2(0.429,0)
  silkscreen extent -0.74,-0.53 0.74,0.53, body extent -0.89,-0.44 0.89,0.44, height 0.25
FP-KMR421NG_LFS-MFG [mm]
  rrect50% 0.9x1 smd paste+0 mask+0: 1(-2.05,0.8) 2(2.05,0.8) 3(-2.05,-0.8) 4(2.05,-0.8)
  silkscreen extent -3.17,-1.4 1.23,1.4, body extent -2.6,-1.5 2.6,1.5, height 0.25
FP-LQFP144-1A-IPC_A [mm]
  rrect50% 1.955x0.312 smd paste+0 mask+0: 1(-10.675,8.75)
  rrect100% 1.955x0.312 smd paste+0 mask+0: 2(-10.675,8.25) 3(-10.675,7.75) 4(-10.675,7.25) 5(-10.675,6.75) 6(-10.675,6.25) 7(-10.675,5.75) 8(-10.675,5.25) 9(-10.675,4.75) 10(-10.675,4.25) 11(-10.675,3.75) 12(-10.675,3.25) 13(-10.675,2.75) 14(-10.675,2.25) 15(-10.675,1.75) 16(-10.675,1.25) 17(-10.675,0.75) 18(-10.675,0.25) 19(-10.675,-0.25) 20(-10.675,-0.75) 21(-10.675,-1.25) 22(-10.675,-1.75) 23(-10.675,-2.25) 24(-10.675,-2.75) 25(-10.675,-3.25) 26(-10.675,-3.75) 27(-10.675,-4.25) 28(-10.675,-4.75) 29(-10.675,-5.25) 30(-10.675,-5.75) 31(-10.675,-6.25) 32(-10.675,-6.75) 33(-10.675,-7.25) 34(-10.675,-7.75) 35(-10.675,-8.25) 36(-10.675,-8.75) 73(10.675,-8.75) 74(10.675,-8.25) 75(10.675,-7.75) 76(10.675,-7.25) 77(10.675,-6.75) 78(10.675,-6.25) 79(10.675,-5.75) 80(10.675,-5.25) 81(10.675,-4.75) 82(10.675,-4.25) 83(10.675,-3.75) 84(10.675,-3.25) 85(10.675,-2.75) 86(10.675,-2.25) 87(10.675,-1.75) 88(10.675,-1.25) 89(10.675,-0.75) 90(10.675,-0.25) 91(10.675,0.25) 92(10.675,0.75) 93(10.675,1.25) 94(10.675,1.75) 95(10.675,2.25) 96(10.675,2.75) 97(10.675,3.25) 98(10.675,3.75) 99(10.675,4.25) 100(10.675,4.75) 101(10.675,5.25) 102(10.675,5.75) 103(10.675,6.25) 104(10.675,6.75) 105(10.675,7.25) 106(10.675,7.75) 107(10.675,8.25) 108(10.675,8.75)
  rrect100% 0.312x1.955 smd paste+0 mask+0: 37(-8.75,-10.675) 38(-8.25,-10.675) 39(-7.75,-10.675) 40(-7.25,-10.675) 41(-6.75,-10.675) 42(-6.25,-10.675) 43(-5.75,-10.675) 44(-5.25,-10.675) 45(-4.75,-10.675) 46(-4.25,-10.675) 47(-3.75,-10.675) 48(-3.25,-10.675) 49(-2.75,-10.675) 50(-2.25,-10.675) 51(-1.75,-10.675) 52(-1.25,-10.675) 53(-0.75,-10.675) 54(-0.25,-10.675) 55(0.25,-10.675) 56(0.75,-10.675) 57(1.25,-10.675) 58(1.75,-10.675) 59(2.25,-10.675) 60(2.75,-10.675) 61(3.25,-10.675) 62(3.75,-10.675) 63(4.25,-10.675) 64(4.75,-10.675) 65(5.25,-10.675) 66(5.75,-10.675) 67(6.25,-10.675) 68(6.75,-10.675) 69(7.25,-10.675) 70(7.75,-10.675) 71(8.25,-10.675) 72(8.75,-10.675) 109(8.75,10.675) 110(8.25,10.675) 111(7.75,10.675) 112(7.25,10.675) 113(6.75,10.675) 114(6.25,10.675) 115(5.75,10.675) 116(5.25,10.675) 117(4.75,10.675) 118(4.25,10.675) 119(3.75,10.675) 120(3.25,10.675) 121(2.75,10.675) 122(2.25,10.675) 123(1.75,10.675) 124(1.25,10.675) 125(0.75,10.675) 126(0.25,10.675) 127(-0.25,10.675) 128(-0.75,10.675) 129(-1.25,10.675) 130(-1.75,10.675) 131(-2.25,10.675) 132(-2.75,10.675) 133(-3.25,10.675) 134(-3.75,10.675) 135(-4.25,10.675) 136(-4.75,10.675) 137(-5.25,10.675) 138(-5.75,10.675) 139(-6.25,10.675) 140(-6.75,10.675) 141(-7.25,10.675) 142(-7.75,10.675) 143(-8.25,10.675) 144(-8.75,10.675)
  silkscreen extent -10.8,-9.25 9.25,9.58, body extent -12.15,-12.15 12.15,12.15, height 0.25
FP-MPZ1005-MFG#1 [mm]
  rrect50% 0.5x0.5 smd paste+0 mask+0: 1(-0.45,0) 2(0.45,0)
  silkscreen extent -0.51,-0.51 0.54,0.51, body extent -0.8,-0.38 0.8,0.38, height 0.25
FP-MPZ1005-MFG#2 [mm]
  rrect25% 0.5x0.5 smd paste+0 mask+0: 1(-0.45,0) 2(0.45,0)
  silkscreen extent -0.53,-0.48 0.52,0.46, body extent -0.8,-0.38 0.8,0.38, height 0.25
FP-PG-SOT23-3-MFG [mm]
  rrect25% 0.9x0.8 smd paste+0 mask+0: 1(-1.1,1) 2(-1.1,-1) 3(1.1,0)
  silkscreen extent -0.28,-1.5 0.7,1.5, body extent -1.65,-1.6 1.65,1.6, height 0.25
FP-RC0402-0_4-IPC_A#1 [mm]
  rrect50% 0.715x0.672 smd paste+0 mask+0: 1(-0.479,0) 2(0.479,0)
  silkscreen extent -0.84,-0.61 0.84,0.61
FP-RC0402-0_4-IPC_A#2 [mm]
  rect 0.715x0.672 smd paste+0 mask+0: 1(-0.479,0) 2(0.479,0)
  silkscreen extent -0.83,-0.64 0.84,0.64, body extent -0.5,-0.25 0.5,0.25, height 0.4
FP-RC0402-0_4-IPC_A#3 [mm]
  rect 0.635x0.672 smd paste+0 mask+0: 1(-0.479,0) 2(0.479,0)
  silkscreen extent -0.84,-0.58 0.83,0.58, body extent -0.5,-0.25 0.5,0.25, height 0.4
FP-RC0402-0_4-IPC_A#4 [mm]
  rrect25% 0.635x0.672 smd paste+0 mask+0: 1(-0.479,0) 2(0.479,0)
  silkscreen extent -0.84,-0.64 0.83,0.64, body extent -0.5,-0.25 0.5,0.25, height 0.4
FP-RC0402-0_4-IPC_A#5 [mm]
  rrect25% 0.584x0.672 smd paste+0 mask+0: 1(-0.479,0) 2(0.479,0)
  silkscreen extent -0.84,-0.58 0.83,0.58, body extent -0.5,-0.25 0.5,0.25, height 0.4
FP-RC0402-0_4-MFG [mm]
  rect 0.5x0.6 smd paste+0 mask+0: 1(-0.5,0) 2(0.5,0)
  silkscreen extent -0.51,-0.51 0.52,0.53, body extent -0.5,-0.25 0.5,0.25, height 0.4
FP-RC1005-IPC_C [mm]
  rect 0.515x0.472 smd paste+0 mask+0: 1(-0.379,0) 2(0.379,0)
  silkscreen extent -0.64,-0.46 0.64,0.48, body extent -0.5,-0.25 0.5,0.25, height 0.4
FP-RMCF0402-MFG [mm]
  rect 0.5x0.6 smd paste+0 mask+0: 1(-0.5,0) 2(0.5,0)
  silkscreen extent -0.58,-0.51 0.53,0.53, body extent -0.85,-0.4 0.85,0.4, height 0.25
FP-SML-P1-MFG [mm]
  rrect25% 0.5x0.6 smd paste+0 mask+0: 1(-0.45,0) 2(0.45,0)
  silkscreen extent -1.38,-0.67 0.53,0.67, body extent -0.8,-0.43 0.8,0.43, height 0.25